# Allegro board H6_PRO_DDR3_V1_1-V163.brd
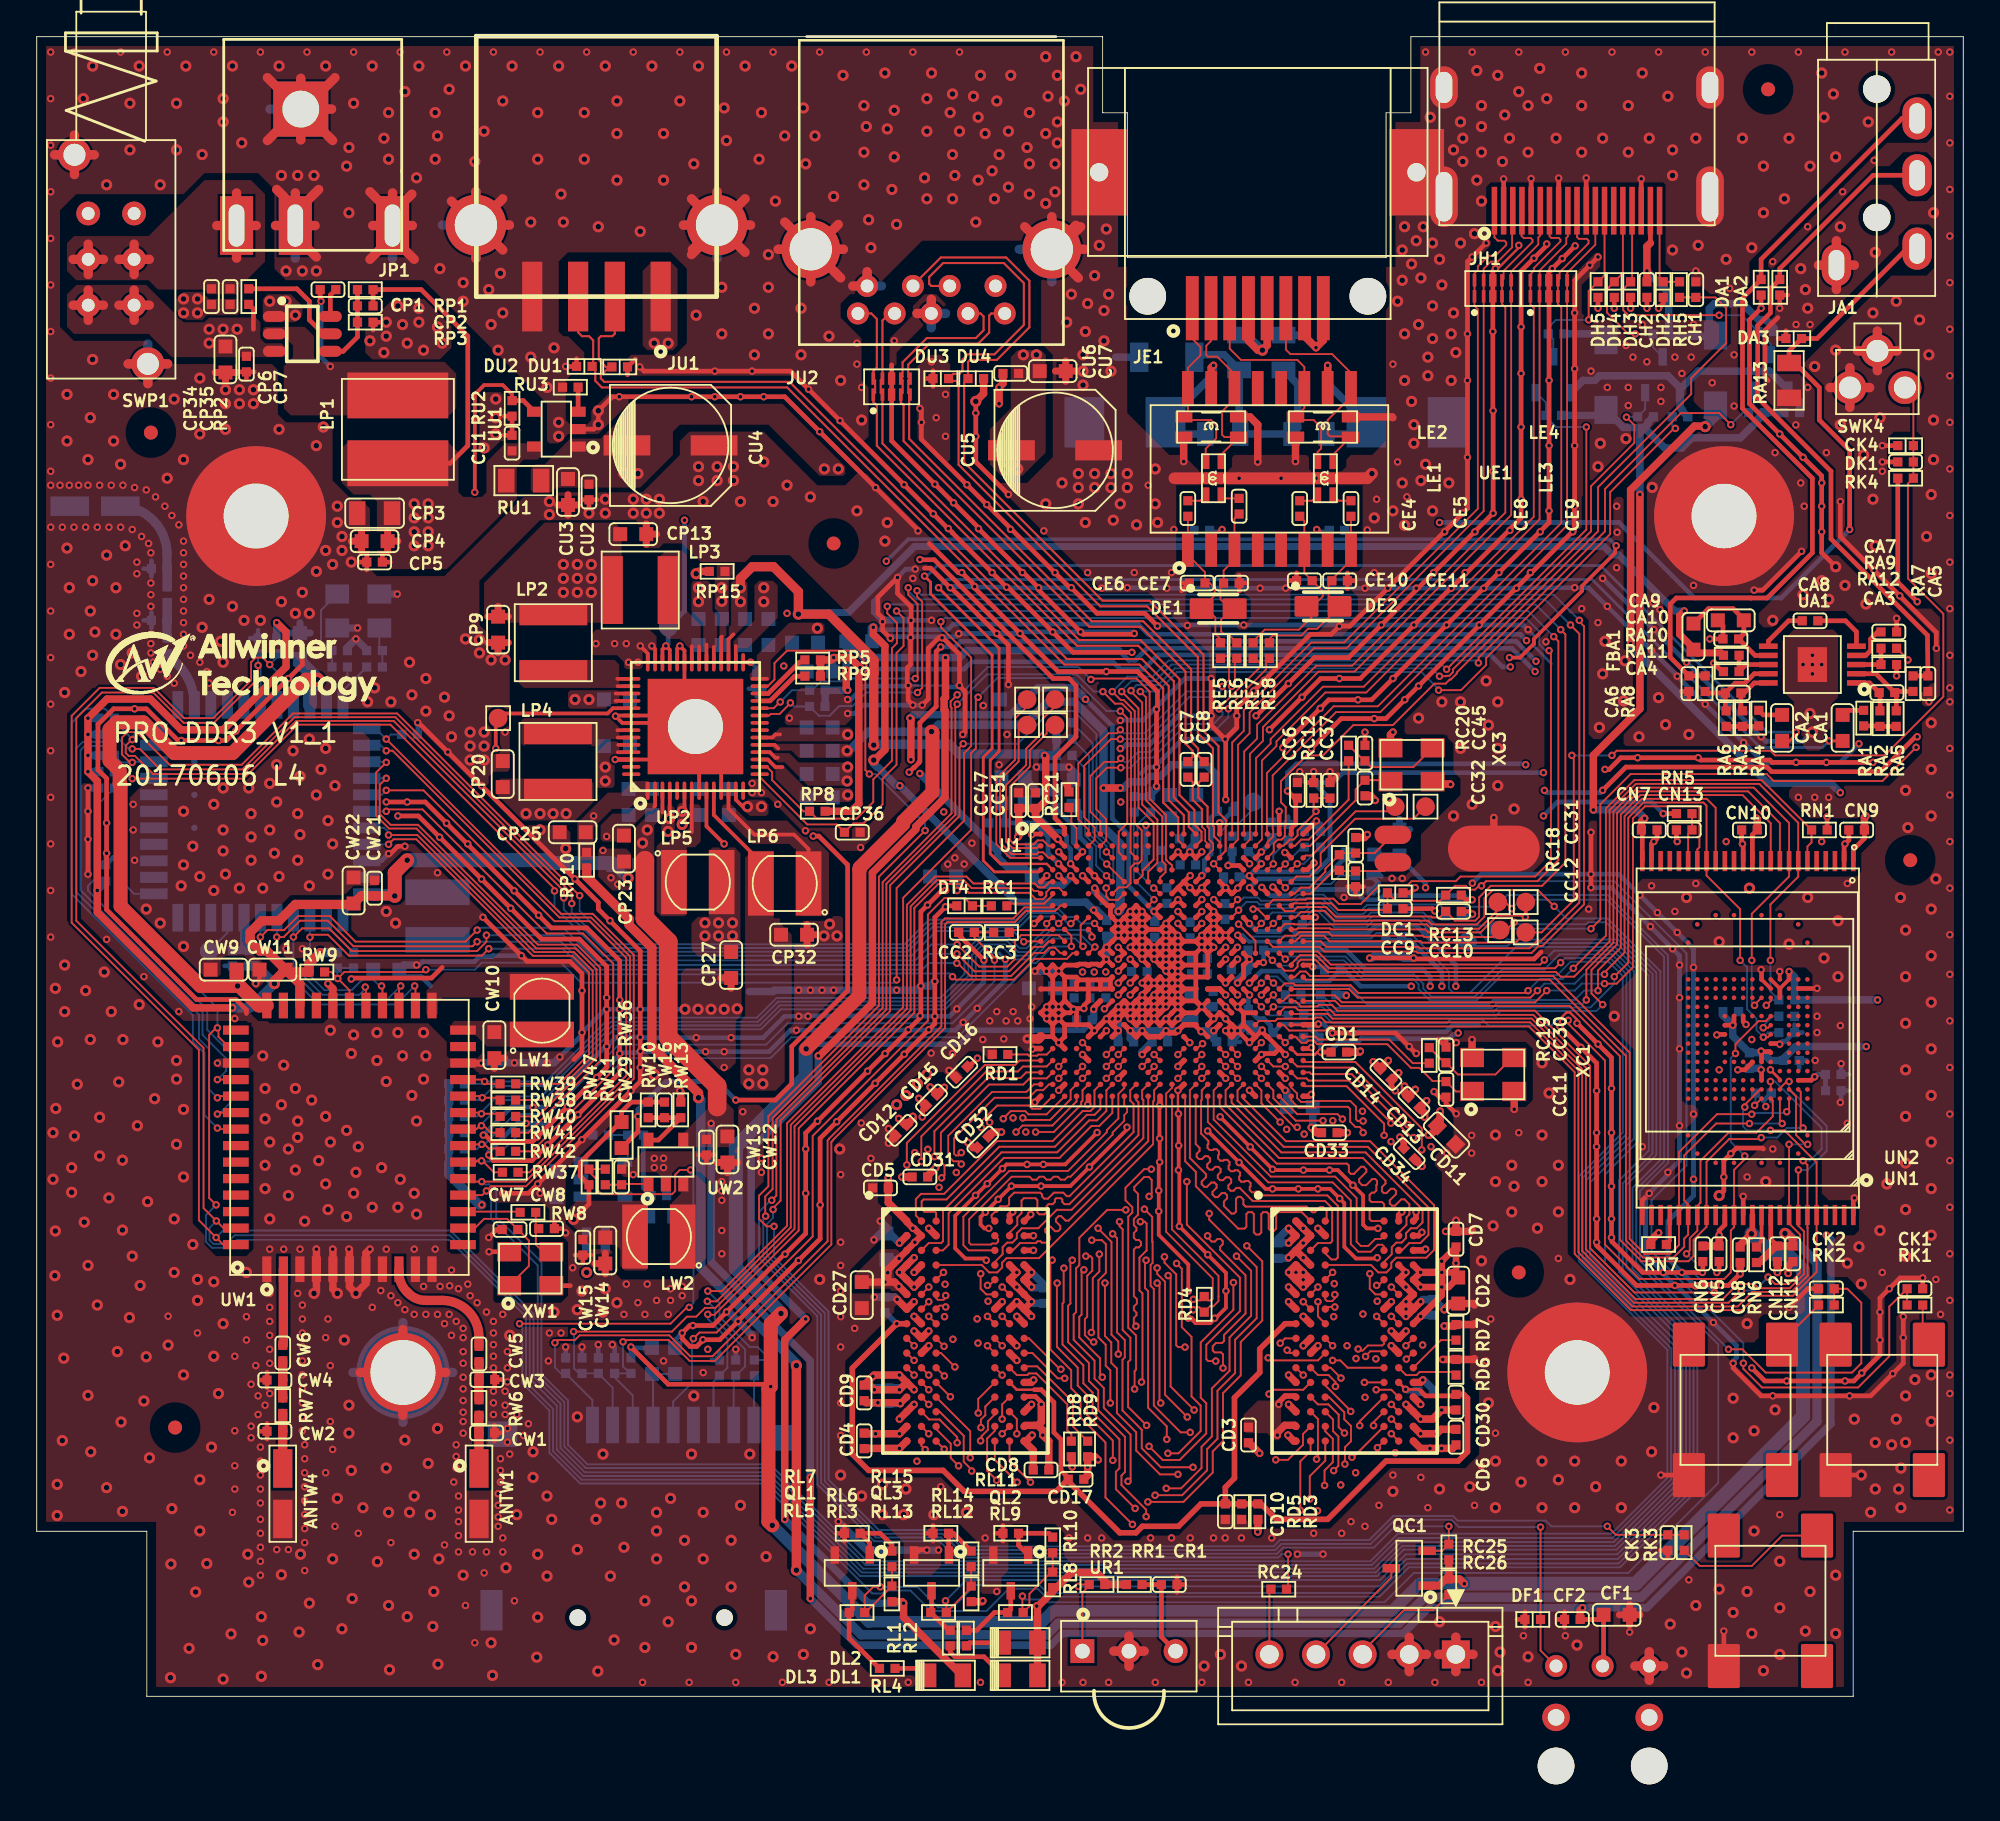
[diagram p0: board, top side]
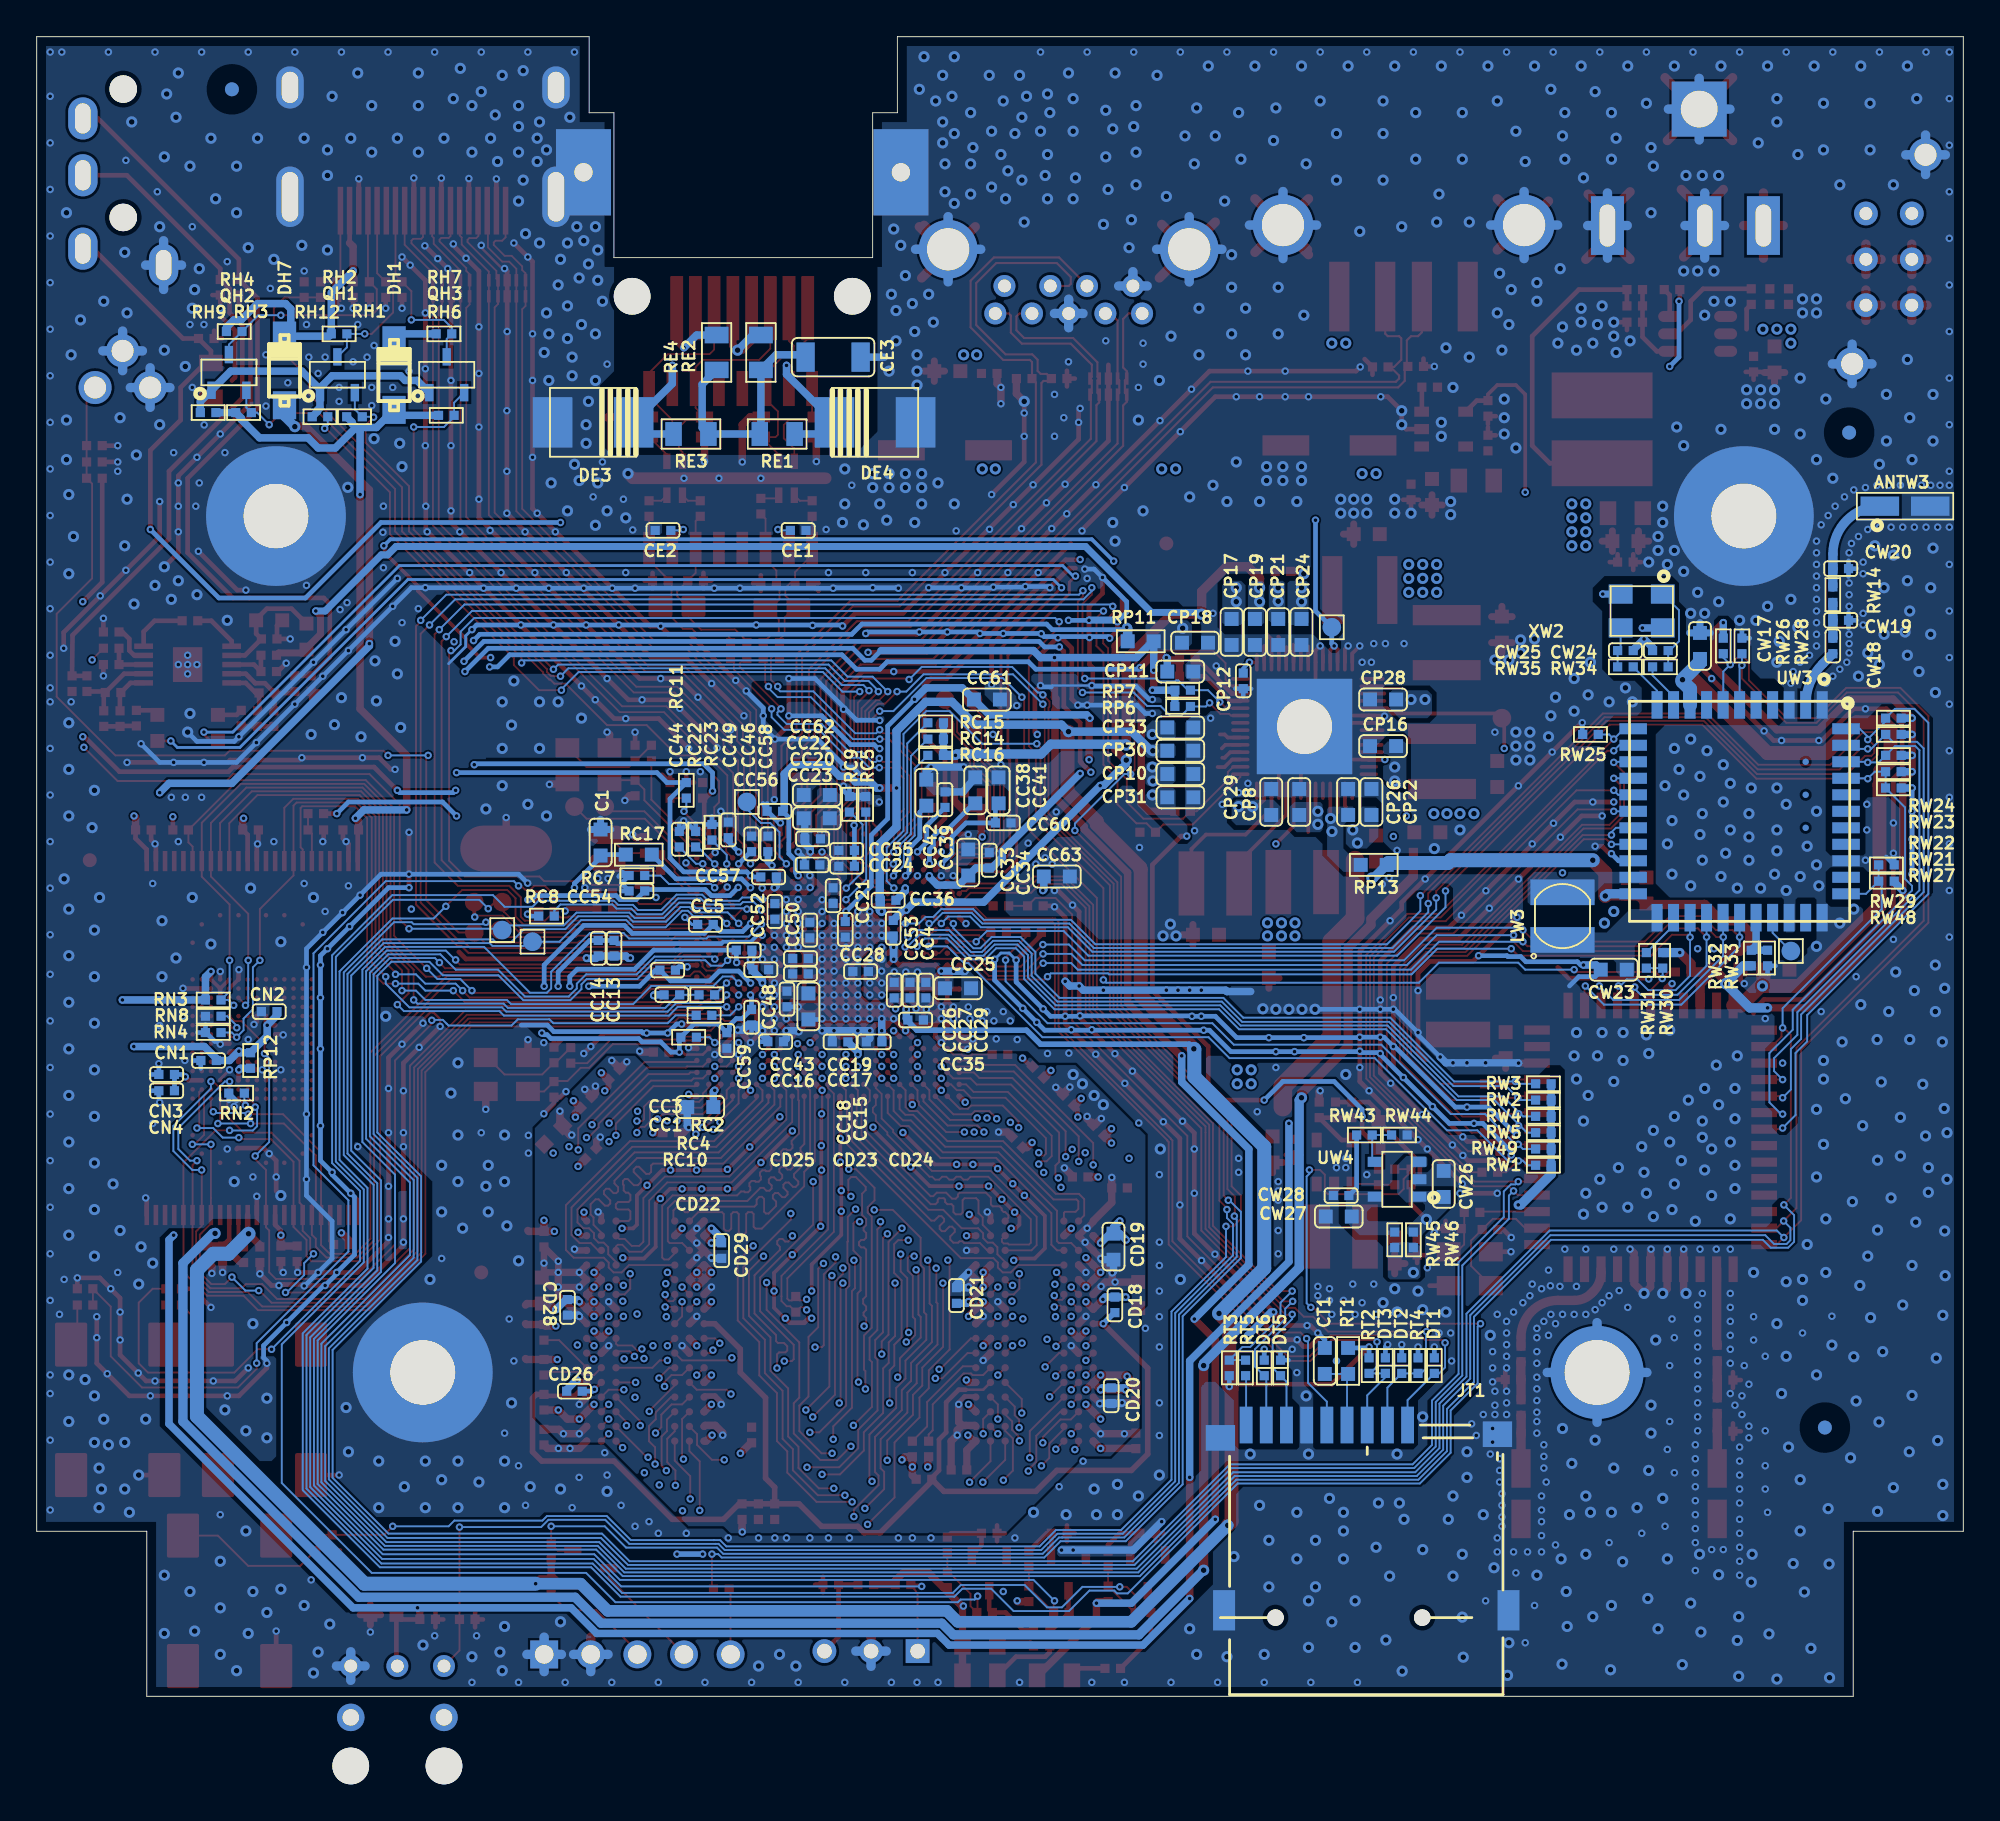
[diagram p1: board, bottom side, seen from below]

Outline 105 x 90.5 mm; copper layers: TOP, L2, L3, BOTTOM. Coordinates in mm from the lower left corner of the outline.
Outline path: 0,90.5 58.09,90.5 58.09,86.35 59.44,86.35 59.44,78.45 73.54,78.45 73.54,86.35 74.89,86.35 74.89,90.5 105,90.5 105,9 99,9 99,0 6,0 6,9 0,9 0,90.5

## Design rules (mm)
net group EPHY-RD: nets EPHY-RDN EPHY-RDP
net group EPHY-RX: nets EPHY-RXN EPHY-RXP
net group EPHY-TD: nets EPHY-TDN EPHY-TDP
net group EPHY-TX: nets EPHY-TXN EPHY-TXP
net group EPY-RX: nets RXN0 RXP0
net group EPY-TX: nets TXN0 TXP0
net group HTX: nets HTXCN HTXCP
net group HTX0: nets HTX0N HTX0P
net group HTX1: nets HTX1N HTX1P
net group HTX2: nets HTX2N HTX2P
net group MIC1: nets MIC1N MIC1P
net group MIC2: nets MIC2N MIC2P
net group SCK: nets SCKN SCKP
net group SDQS0: nets SDQS0N SDQS0P
net group USB1-SSRX: nets USB1-SSRXN USB1-SSRXP
net group USB1-SSTX: nets USB1-SSTXN USB1-SSTXP
net group USB30-1: nets N22859304 N22859306
net group USB-D0: nets USB0-DM USB0-DP
net group USB-D1: nets USB1-DM USB1-DP
net group DQ1: nets SDQ8 SDQ9 SDQ10 SDQ11 SDQ12 SDQ13 SDQ14 SDQ15 SDQM1 SDQS1N SDQS1P
net group DQ2: nets SDQ16 SDQ17 SDQ18 SDQ19 SDQ20 SDQ21 SDQ22 SDQ23 SDQM2 SDQS2N SDQS2P
net group DQ3: nets SDQ24 SDQ25 SDQ26 SDQ27 SDQ28 SDQ29 SDQ30 SDQ31 SDQM3 SDQS3N SDQS3P
nets with their own width: min track width 0.254; nets HDMI-5V

## Placement (name value [footprint] x y rotation side)
ANTW1  NC-ANT  [ANT2B145_525]  24.1 11.05 270 top
ANTW3  NC-ANT  [ANT2B145_525]  3.17 64.9 180 bottom
ANTW4  NC-ANT  [ANT2B145_525]  13.41 11.05 270 top
C1  4.7uF  [C0603]  74.27 46.56 270 bottom
CA1  4.7uF  [C0603]  98.42 52.81 270 top
CA2  4.7uF  [C0603]  95.12 52.81 90 top
CA3  33pF  [C0402]  100.84 54.74 0 top
CA4  33pF  [C0402]  92.46 54.71 180 top
CA5  NC  [C0402]  103.07 55.22 270 top
CA6  NC  [C0402]  90.04 55.22 270 top
CA7  334  [C0402]  100.94 58.04 0 top
CA8  334  [C0402]  96.65 58.65 180 top
CA9  10uF  [C0603]  92.33 58.67 180 top
CA10  104  [C0402]  92.33 57.66 180 top
CC1  NC  [C0402]  70.38 38.25 180 bottom
CC2  5pF  [C0402]  50.67 41.66 0 top
CC3  104  [C0402]  70.61 39.6 0 bottom
CC4  104  [C0402]  58.32 41.88 90 bottom
CC5  104  [C0402]  68.55 42.09 180 bottom
CC6  104  [C0402]  68.71 49.4 270 top
CC7  104  [C0402]  62.74 50.55 90 top
CC8  104  [C0402]  63.63 50.55 90 top
CC9  102  [C0402]  74.04 42.95 180 top
CC10  102  [C0402]  77.22 42.8 180 top
CC11  18pF  [C0402]  76.81 33.1 90 top
CC12  18pF  [C0402]  71.88 44.58 90 top
CC13  1uF  [C0402]  73.53 40.79 90 bottom
CC14  104  [C0402]  74.4 40.79 90 bottom
CC15  10uF  [C0603]  62.94 37.62 90 bottom
CC16  1uF  [C0402]  65.53 39.62 180 bottom
CC17  1uF  [C0402]  63.37 39.4 0 bottom
CC18  104  [C0402]  64.11 38.02 90 bottom
CC19  104  [C0402]  63.37 40.23 0 bottom
CC20  10uF  [C0603]  62.48 47.88 180 bottom
CC21  1uF  [C0402]  61.59 43.66 90 bottom
CC22  1uF  [C0402]  62.74 45.34 180 bottom
CC23  104  [C0402]  62.71 46.76 180 bottom
CC24  104  [C0402]  60.86 45.26 0 bottom
CC25  10uF  [C0603]  54.79 38.61 0 bottom
CC26  1uF  [C0402]  58.27 38.51 90 bottom
CC27  1uF  [C0402]  57.4 38.51 90 bottom
CC28  104  [C0402]  60.1 39.52 180 bottom
CC29  104  [C0402]  56.54 38.51 90 bottom
CC30  18pF  [C0402]  76.81 34.98 270 top
CC31  18pF  [C0402]  71.88 46.41 270 top
CC32  18pF  [C0402]  72.39 49.53 90 top
CC33  10uF  [C0603]  54.23 45.47 270 bottom
CC34  104  [C0402]  53.09 45.59 270 bottom
CC35  1uF  [C0402]  57.1 36.88 0 bottom
CC36  104  [C0402]  58.6 43.41 0 bottom
CC37  102  [C0402]  70.48 49.4 270 top
CC38  4.7uF  [C0603]  53.85 49.4 270 bottom
CC39  1uF  [C0402]  55.5 48.9 270 bottom
CC41  10uF  [C0603]  52.58 49.4 270 bottom
CC42  4.7uF  [C0603]  56.52 49.28 270 bottom
CC43  104  [C0402]  66.45 40.69 0 bottom
CC44  224  [C0402]  69.98 46.74 270 bottom
CC45  18pF  [C0402]  72.39 51.44 270 top
CC46  1uF  [C0402]  66.04 46.48 270 bottom
CC47  104  [C0402]  53.52 48.84 270 top
CC48  104  [C0402]  66.04 37.03 90 bottom
CC49  104  [C0402]  67.31 47.24 270 bottom
CC50  104  [C0402]  62.87 41.78 90 bottom
CC51  104  [C0402]  54.43 48.84 270 top
CC52  1uF  [C0402]  64.77 42.8 90 bottom
CC53  104  [C0402]  60.93 41.82 90 bottom
CC54  104  [C0402]  72.29 43.92 180 bottom
CC55  104  [C0402]  60.86 46.13 0 bottom
CC56  104  [C0402]  64.77 48.26 180 bottom
CC57  104  [C0402]  65.11 44.68 0 bottom
CC58  104  [C0402]  65.15 46.48 270 bottom
CC59  1uF  [C0402]  67.39 35.76 90 bottom
CC60  104  [C0402]  52.32 47.62 0 bottom
CC61  4.7uF  [C0603]  53.21 54.36 0 bottom
CC62  10uF  [C0603]  62.48 49.15 180 bottom
CC63  10uF  [C0603]  49.4 44.7 0 bottom
CD1  104  [C0402]  70.97 35.13 180 top
CD2  10uF  [C0603]  77.47 22.13 90 top
CD3  1uF  [C0402]  66.04 14.25 90 top
CD4  1uF  [C0402]  45.1 13.93 90 top
CD5  1uF  [C0402]  45.98 27.72 0 top
CD6  104  [C0402]  77.35 14.13 90 top
CD7  104  [C0402]  77.35 24.93 270 top
CD8  104  [C0402]  54.74 12.34 0 top
CD9  104  [C0402]  45.1 16.55 270 top
CD10  104  [C0402]  64.78 10.07 90 top
CD11  10uF  [C0603]  76.83 30.61 135 top
CD12  1uF  [C0402]  47.12 30.86 45 top
CD13  1uF  [C0402]  75.06 32.38 135 top
CD14  104  [C0402]  73.53 33.91 135 top
CD15  104  [C0402]  48.77 32.51 45 top
CD16  104  [C0402]  50.42 34.04 45 top
CD17  104  [C0402]  56.64 11.84 180 top
CD18  NC-104  [C0402]  46.24 21.35 270 bottom
CD19  NC-10uF  [C0603]  46.31 24.52 270 bottom
CD20  NC-1uF  [C0402]  46.44 16.39 270 bottom
CD21  NC-104  [C0402]  54.87 21.85 90 bottom
CD22  NC-10uF  [C0603]  68.83 32.13 0 bottom
CD23  NC-1uF  [C0402]  61.21 35.69 0 bottom
CD24  NC-104  [C0402]  59.36 35.69 0 bottom
CD25  NC-104  [C0402]  64.73 35.69 180 bottom
CD26  NC-104  [C0402]  75.69 16.64 180 bottom
CD27  10uF  [C0603]  44.97 21.88 90 top
CD28  NC-1uF  [C0402]  76.07 21.21 270 bottom
CD29  NC-104  [C0402]  67.67 24.31 270 bottom
CD30  104  [C0402]  77.35 16.04 90 top
CD31  104  [C0402]  48.13 28.32 0 top
CD32  104  [C0402]  51.56 30.23 45 top
CD33  104  [C0402]  70.45 30.73 180 top
CD34  104  [C0402]  74.8 29.59 135 top
CE1  104  [C0402]  63.5 63.58 180 bottom
CE2  104  [C0402]  70.87 63.58 0 bottom
CE3  1000pF/2KV  [C1206]  61.59 73.03 180 bottom
CE4  NC-104  [C0402]  62.74 64.77 270 top
CE5  NC-104  [C0402]  65.53 64.9 270 top
CE6  NC-10pF  [C0402]  63.25 60.71 180 top
CE7  NC-10pF  [C0402]  65.11 60.7 0 top
CE8  NC-104  [C0402]  68.83 64.77 270 top
CE9  NC-104  [C0402]  71.63 64.77 270 top
CE10  NC-10pF  [C0402]  69.09 60.83 180 top
CE11  NC-10pF  [C0402]  71.01 60.83 0 top
CF1  4.7uF  [C0603]  86.11 4.45 180 top
CF2  104  [C0402]  83.69 4.19 0 top
CH1  104  [C0402]  90.42 76.71 90 top
CH2  104  [C0402]  87.76 76.71 270 top
CK1  472  [C0402]  102.36 22.23 0 top
CK2  104  [C0402]  97.54 22.23 180 top
CK3  104  [C0402]  88.9 8.38 270 top
CK4  474  [C0402]  101.85 67.31 180 top
CN1  104  [C0402]  95.63 34.67 180 bottom
CN2  104  [C0402]  92.33 37.34 180 bottom
CN3  2.2uF  [C0402]  97.92 33.91 180 bottom
CN4  104  [C0402]  97.92 33.02 180 bottom
CN5  104  [C0402]  91.69 24.13 90 top
CN6  104  [C0402]  90.81 24.13 90 top
CN7  104  [C0402]  87.88 47.24 180 top
CN8  104  [C0402]  92.84 24.08 90 top
CN9  104  [C0402]  99.19 47.24 0 top
CN10  104  [C0402]  93.34 47.24 0 top
CN11  104  [C0402]  95.71 24.13 90 top
CN12  104  [C0402]  94.87 24.13 90 top
CN13  104  [C0402]  89.79 47.24 0 top
CP1  104  [C0402]  15.88 76.71 180 top
CP2  NC-27pF  [C0402]  17.91 75.82 180 top
CP3  22uF  [C0805]  18.41 64.52 180 top
CP4  10uF  [C0603]  18.41 62.99 180 top
CP5  104  [C0402]  18.41 61.85 180 top
CP6  10uF-16V  [C0603]  10.29 72.9 270 top
CP7  104-16V  [C0402]  11.43 72.64 270 top
CP8  10uF  [C0603]  36.2 48.77 90 bottom
CP9  10uF  [C0603]  25.15 58.17 270 top
CP10  10uF  [C0603]  42.67 50.29 180 bottom
CP11  4.7uF  [C0603]  42.67 55.88 0 bottom
CP12  1uF  [C0402]  39.24 55.37 90 bottom
CP13  10uF  [C0603]  32.51 63.37 0 top
CP16  10uF  [C0603]  31.62 51.82 0 bottom
CP17  10uF  [C0603]  39.88 58.04 90 bottom
CP18  10uF  [C0603]  41.87 57.45 0 bottom
CP19  10uF  [C0603]  38.61 58.04 90 bottom
CP20  10uF  [C0603]  25.4 50.29 90 top
CP21  10uF  [C0603]  37.34 58.04 90 bottom
CP22  10uF  [C0603]  32.26 48.77 270 bottom
CP23  4.7uF  [C0603]  32 46.23 90 top
CP24  10uF  [C0603]  36.07 58.04 270 bottom
CP25  4.7uF  [C0603]  29.21 47.12 0 top
CP26  4.7uF  [C0603]  33.53 48.77 270 bottom
CP27  10uF  [C0603]  37.85 39.88 270 top
CP28  10uF  [C0603]  31.62 54.36 180 bottom
CP29  10uF  [C0603]  37.72 48.77 90 bottom
CP30  10uF  [C0603]  42.67 51.56 0 bottom
CP31  10uF  [C0603]  42.67 49.02 0 bottom
CP32  10uF  [C0603]  41.27 41.53 0 top
CP33  10uF  [C0603]  42.67 52.83 0 bottom
CP34  104  [C0402]  9.53 76.33 270 top
CP35  102  [C0402]  10.54 76.33 270 top
CP36  102  [C0402]  44.45 47.12 180 top
CR1  104  [C0402]  61.72 6.1 180 top
CT1  10uF  [C0603]  34.8 18.29 270 bottom
CU1  1uF  [C0402]  25.91 68.34 270 top
CU2  104  [C0402]  30.1 65.67 90 top
CU3  10uF  [C0603]  28.96 65.67 90 top
CU4  220uF  [CA660H770]  34.54 68.21 180 top
CU5  220uF  [CA660H770]  55.5 67.94 180 top
CU6  104  [C0402]  53.09 72.14 0 top
CU7  10uF  [C0603]  55.37 72.26 180 top
CW1  NC  [C0402]  24.52 14.36 0 top
CW2  NC  [C0402]  12.98 14.45 0 top
CW3  NC  [C0402]  24.54 17.27 0 top
CW4  NC  [C0402]  12.98 17.25 0 top
CW5  10pF  [C0402]  24.1 18.67 270 top
CW6  10pF  [C0402]  13.41 18.72 270 top
CW7  18pF  [C0402]  25.8 25.45 0 top
CW8  18pF  [C0402]  27.79 25.5 180 top
CW9  4.7uF  [C0603]  10.19 39.62 0 top
CW10  4.7uF  [C0603]  24.94 35.51 90 top
CW11  4.7uF  [C0603]  12.85 39.62 0 top
CW12  10uF  [C0603]  37.64 29.82 270 top
CW13  104  [C0402]  36.5 29.95 270 top
CW14  10uF  [C0603]  30.99 24.31 270 top
CW15  104  [C0402]  29.77 24.49 270 top
CW16  22pF  [C0402]  34.21 31.98 90 top
CW17  10uF  [C0603]  14.35 57.28 270 bottom
CW18  10pF  [C0402]  7.11 57.28 270 bottom
CW19  NC  [C0402]  6.68 58.67 180 bottom
CW20  NC  [C0402]  6.68 61.49 180 bottom
CW21  4.7uF  [C0402]  18.41 44.07 90 top
CW22  4.7uF  [C0603]  17.27 43.94 90 top
CW23  4.7uF  [C0603]  19.05 39.62 0 bottom
CW24  18pF  [C0402]  16.51 57.02 180 bottom
CW25  18pF  [C0402]  18.41 57.02 0 bottom
CW26  4.7uF  [C0603]  28.32 27.94 90 bottom
CW27  4.7uF  [C0603]  34.04 26.16 0 bottom
CW28  104  [C0402]  33.91 27.3 0 bottom
CW29  104  [C0402]  31.88 28.32 90 top
DA1  NC-ESD5451X  [ESD0402]  93.98 76.83 90 top
DA2  NC-ESD5451X  [ESD0402]  95 76.83 90 top
DA3  ESD5451X  [ESD0402]  95.76 74.04 0 top
DC1  ESD5451X  [ESD0402]  74.04 43.81 0 top
DE1  SPD9103W  [SOD323]  64.39 59.31 0 top
DE2  SPD9103W  [SOD323]  70.1 59.44 0 top
DE3  SPD4200B  [SOD375_470H260]  74.68 69.47 180 bottom
DE4  SPD4200B  [SOD375_470H260]  59.31 69.47 0 bottom
DF1  NC-ESD5451X  [ESD0402]  81.53 4.19 180 top
DH1  BAT54W  [SOD123]  85.72 74.55 270 bottom
DH2  ESD5451X  [ESD0402]  88.65 76.71 270 top
DH3  ESD5451X  [ESD0402]  86.87 76.71 270 top
DH4  ESD5451X  [ESD0402]  85.98 76.71 270 top
DH5  ESD5451X  [ESD0402]  85.09 76.71 270 top
DH7  XBS104S14  [SOD123]  91.69 74.8 270 bottom
DK1  NC-ESD5451X  [ESD0402]  101.85 68.2 180 top
DL1  RED  [LED0805]  53.59 1.14 180 top
DL2  BLUE  [LED0805]  53.59 2.92 180 top
DL3  YELLOW  [LED0805]  49.53 1.14 180 top
DT1  NC-ESD5451X  [ESD0402]  28.83 18.03 90 bottom
DT2  NC-ESD5451X  [ESD0402]  30.61 18.03 90 bottom
DT3  NC-ESD5451X  [ESD0402]  31.5 18.03 90 bottom
DT4  NC-ESD5451X  [ESD0402]  50.57 43.1 180 top
DT5  NC-ESD5451X  [ESD0402]  37.21 17.91 90 bottom
DT6  NC-ESD5451X  [ESD0402]  38.1 17.91 90 bottom
DU1  ESD9B5VL-2/TR  [ESD0402]  31.78 72.49 0 top
DU2  ESD9B5VL-2/TR  [ESD0402]  29.84 72.52 180 top
DU3  ESD9B5VL-2/TR  [ESD0402]  49.28 71.86 180 top
DU4  ESD9B5VL-2/TR  [ESD0402]  51.18 71.86 0 top
FBA1  0R  [L0603]  90.3 57.78 90 top
JA1  PJK-114  [PJ320A]  102.48 86.04 0 top
JC1  CON2  [HDR1_5P250B570_1500H700]  67.18 2.29 0 top
JE1  RJ-45  [RJ8P102B1370_1850H105]  66.55 81.95 90 top
JF1  NC-SIP-7  [OPTICAL_JACK]  82.8 1.65 180 top
JH1  HDMI_19plug type A  [HDMI23P50B1215_1500H838]  83.95 86.3 0 top
JP1  DC-IN-JACK  [DC-1]  19.39 80.2 270 top
JT1  MICROSD/TF_SLOT  [SDC13B1470_1490H170]  32.54 7.44 180 bottom
JU1  USB_A_1  [USB4P200B1310_1420H700]  30.51 76.33 180 top
JU2  USB3.0-AF-SIDE  [USB30AFDIP]  48.76 76.91 180 top
LE1  NC-YCM0805F2SF-801-N  [YPF0805F2SF]  64.14 66.42 90 top
LE2  NC-YLM1206F2SF-101-A  [YLM1206F2SF]  64.01 69.22 0 top
LE3  NC-YCM0805F2SF-801-N  [YPF0805F2SF]  70.23 66.42 90 top
LE4  NC-YLM1206F2SF-101-A  [YLM1206F2SF]  70.1 69.22 0 top
LP1  4.7uH@3A DCR<0.1R  [LP520_580H450]  19.68 69.09 270 top
LP2  1.5uH@3A DCR<0.1R  [LP400_400H120]  28.16 57.45 90 top
LP3  1.5uH@3A DCR<0.1R  [LP400_400H120]  32.89 60.33 180 top
LP4  1.5uH@3A DCR<0.1R  [LP400_400H120]  28.41 50.98 270 top
LP5  1.5uH@2A DCR<0.1R  [LP300_350H210]  36.03 44.4 0 top
LP6  1.5uH@2A DCR<0.1R  [LP300_350H210]  40.77 44.32 180 top
LW1  4.7uH@1A DCR<0.1R  [LP300_350H210]  27.53 37.39 90 top
LW2  4.7uH@1A DCR<0.1R  [LP300_350H210]  33.91 25.07 180 top
LW3  4.7uH@1A DCR<0.1R  [LP300_350H210]  21.84 42.55 90 bottom
NOREF  -  []  0 0 0 top
NOREF#2  -  []  3.68 53.85 0 top
NOREF#3  -  []  0 0 0 top
NOREF#4  -  [unnamed#2]  102.11 45.59 0 top
NOREF#5  -  [unnamed#2]  6.22 68.91 0 top
NOREF#6  -  [unnamed#2]  80.77 23.11 0 top
NOREF#7  -  [unnamed#2]  7.54 14.66 0 top
NOREF#8  -  [unnamed#2]  94.36 87.63 0 top
NOREF#9  -  [unnamed#2]  43.43 62.87 0 top
NOREF#10  -  []  0 0 0 top
NOREF#11  -  [unnamed#2]  94.36 87.63 180 bottom
NOREF#12  -  [unnamed#2]  6.22 68.91 180 bottom
NOREF#13  -  [unnamed#2]  7.54 14.66 180 bottom
QC1  BSN20  [SOT3P95B130_290H103]  74.8 6.99 180 top
QH1  BSN20  [SOT3P95B130_290H103]  88.61 72.06 90 bottom
QH2  BSN20  [SOT3P95B130_290H103]  94.52 72.19 90 bottom
QH3  BSN20  [SOT3P95B130_290H103]  82.65 72.06 90 bottom
QL1  MMBT3904  [SOT3P95B130_290H103]  44.45 6.73 270 top
QL2  MMBT3904  [SOT3P95B130_290H103]  53.09 6.73 270 top
QL3  MMBT3904  [SOT3P95B130_290H103]  48.77 6.73 270 top
RA1  10K  [R0402]  99.57 53.34 90 top
RA2  3K3  [R0402]  100.46 53.31 270 top
RA3  3K3  [R0402]  92.96 53.31 90 top
RA4  10K  [R0402]  93.85 53.34 270 top
RA5  27K  [R0402]  101.35 53.31 90 top
RA6  27K  [R0402]  92.08 53.31 90 top
RA7  0R  [R0402]  102.26 55.22 90 top
RA8  0R  [R0402]  90.93 55.22 270 top
RA9  1K  [R0402]  100.94 57.15 0 top
RA10  4K7  [R0402]  92.35 56.77 0 top
RA11  3K3  [R0402]  92.35 55.88 0 top
RA12  10K  [R0402]  100.94 56.26 0 top
RA13  75R-1%  [R0805]  95.5 71.75 270 top
RC1  33R  [R0402]  52.45 43.1 180 top
RC2  33R  [R0402]  68.48 38.25 180 bottom
RC3  33R  [R0402]  52.58 41.66 180 top
RC4  0R-33R  [R0402]  68.63 37.13 180 bottom
RC5  NC-0R  [R0402]  59.82 48.64 90 bottom
RC7  NC-0R  [R0402]  72.29 44.75 0 bottom
RC8  NC-1K  [R0402]  77.22 42.55 0 bottom
RC9  NC-0R  [R0402]  60.71 48.64 90 bottom
RC10  NC-200R  [R0402]  69.47 35.94 0 bottom
RC11  1K  [R0402]  69.6 49.4 90 bottom
RC12  NC  [R0402]  69.6 49.4 90 top
RC13  10K  [R0402]  77.22 43.69 180 top
RC14  2K  [R0402]  56.01 52.2 180 bottom
RC15  2K  [R0402]  56.01 53.09 180 bottom
RC16  10K  [R0402]  56.01 51.31 180 bottom
RC17  0R  [R0603]  72.19 45.9 180 bottom
RC18  10M-1%  [R0402]  70.99 45.47 270 top
RC19  0R  [R0402]  75.9 34.95 270 top
RC20  0R  [R0402]  71.5 51.44 270 top
RC21  6K04-1%  [R0402]  56.26 48.9 90 top
RC22  150K-1%  [R0402]  69.09 46.74 90 bottom
RC23  10K  [R0402]  68.2 47.12 90 bottom
RC24  0R  [R0402]  67.69 5.84 180 top
RC25  10K  [R0402]  76.96 7.87 90 top
RC26  NC  [R0402]  76.96 5.97 270 top
RD1  240-1%  [R0402]  52.5 35 180 top
RD3  2K-1%  [R0402]  66.56 10.07 270 top
RD4  100R  [R0402]  63.63 21.37 270 top
RD5  2K-1%  [R0402]  65.67 10.07 90 top
RD6  240-1%  [R0402]  77.35 17.94 270 top
RD7  240-1%  [R0402]  77.35 19.85 270 top
RD8  240-1%  [R0402]  56.39 13.49 90 top
RD9  240-1%  [R0402]  57.28 13.49 90 top
RE1  75R-1%  [R0805]  64.64 68.83 0 bottom
RE2  75R-1%  [R0805]  65.53 73.28 270 bottom
RE3  75R-1%  [R0805]  69.34 68.83 180 bottom
RE4  75R-1%  [R0805]  67.94 73.28 270 bottom
RE5  0R  [R0402]  64.52 57.02 90 top
RE6  0R  [R0402]  65.41 57.02 90 top
RE7  0R  [R0402]  66.29 57.02 90 top
RE8  0R  [R0402]  67.18 57.02 90 top
RH1  10K  [R0402]  87.68 69.77 180 bottom
RH2  1K8  [R0402]  88.52 74.3 0 bottom
RH3  10K  [R0402]  93.73 70 180 bottom
RH4  1K8  [R0402]  94.23 74.42 0 bottom
RH5  10K  [R0402]  89.53 76.71 90 top
RH6  56K-1%  [R0402]  82.68 69.85 180 bottom
RH7  56K-1%  [R0402]  82.8 74.3 0 bottom
RH9  NC-0R  [R0402]  95.66 70 0 bottom
RH12  0R  [R0402]  89.56 69.77 0 bottom
RK1  1K  [R0402]  102.36 21.34 180 top
RK2  1K  [R0402]  97.54 21.34 0 top
RK3  1K  [R0402]  89.79 8.38 90 top
RK4  10K  [R0402]  101.85 66.42 180 top
RL1  330R  [R0402]  49.78 3.17 270 top
RL2  330R  [R0402]  50.67 3.17 270 top
RL3  10K  [R0402]  46.61 5.59 90 top
RL4  330R  [R0402]  46.35 1.52 0 top
RL5  NC-0R  [R0402]  44.7 4.57 0 top
RL6  10K  [R0402]  46.61 7.49 270 top
RL7  100K  [R0402]  44.45 8.89 180 top
RL8  NC-10K  [R0402]  55.37 6.35 90 top
RL9  NC-0R  [R0402]  53.34 4.57 0 top
RL10  10K  [R0402]  55.37 8.26 270 top
RL11  100K  [R0402]  53.09 8.89 180 top
RL12  NC-10K  [R0402]  50.93 5.59 90 top
RL13  NC-0R  [R0402]  49.15 4.57 0 top
RL14  10K  [R0402]  50.93 7.49 270 top
RL15  100K  [R0402]  49.28 8.89 180 top
RN1  10K  [R0402]  97.16 47.24 180 top
RN2  0R  [R0402]  94.11 32.89 180 bottom
RN3  10K  [R0402]  95.38 37.97 180 bottom
RN4  10K  [R0402]  95.38 36.2 180 bottom
RN5  10K  [R0402]  89.79 48.13 0 top
RN6  NC-0R  [R0402]  93.73 24.08 90 top
RN7  NC-0R  [R0402]  88.39 24.64 0 top
RN8  0R  [R0402]  95.38 37.08 180 bottom
RP1  16K-1%  [R0402]  17.91 76.71 180 top
RP2  1K  [R0402]  11.56 76.33 270 top
RP3  3K-1%  [R0402]  17.91 74.93 180 top
RP5  0R  [R0402]  42.29 56.52 180 top
RP6  2K  [R0402]  42.55 53.98 0 bottom
RP7  2K  [R0402]  42.55 54.86 0 bottom
RP8  2K  [R0402]  42.55 48.26 180 top
RP9  0R-1%  [R0402]  42.29 55.63 180 top
RP10  0R  [R0402]  29.97 45.59 270 top
RP11  NC-0R  [R0603]  44.83 57.53 180 bottom
RP12  NC-0R  [R0402]  93.34 34.67 270 bottom
RP13  NC-0R  [R0603]  32.13 45.34 0 bottom
RP15  NC-0R  [R0402]  37.08 61.34 0 top
RR1  33R  [R0402]  59.82 6.1 180 top
RR2  10K  [R0402]  57.78 6.1 0 top
RT1  0R  [R0603]  33.53 18.29 270 bottom
RT2  10K  [R0402]  32.38 18.03 270 bottom
RT3  100K  [R0402]  40.01 17.91 90 bottom
RT4  NC-1M  [R0402]  29.72 18.03 270 bottom
RT5  1K  [R0402]  39.12 17.91 270 bottom
RU1  NC-0R  [R0805]  26.54 66.29 0 top
RU2  100K  [R0402]  25.91 70.23 90 top
RU3  4K3-1%  [R0402]  29.08 71.39 0 top
RW1  10K  [R0402]  22.89 28.96 180 bottom
RW2  10K  [R0402]  22.89 32.51 180 bottom
RW3  10K  [R0402]  22.89 33.4 180 bottom
RW4  10K  [R0402]  22.89 31.62 180 bottom
RW5  10K  [R0402]  22.89 30.73 180 bottom
RW6  0R  [R0402]  24.1 15.75 270 top
RW7  0R  [R0402]  13.41 15.85 270 top
RW8  22R  [R0402]  26.77 26.39 180 top
RW9  10K  [R0402]  15.27 39.5 0 top
RW10  10K-1%  [R0402]  33.32 31.98 90 top
RW11  10K  [R0402]  30.99 28.32 270 top
RW13  2K2-1%  [R0402]  35.1 31.98 270 top
RW14  0R  [R0402]  7.11 60.07 270 bottom
RW21  NC-10K  [R0402]  3.81 50.42 0 bottom
RW22  NC-10K  [R0402]  3.81 51.31 0 bottom
RW23  NC-10K  [R0402]  3.81 52.45 0 bottom
RW24  NC-10K  [R0402]  3.81 53.34 0 bottom
RW25  100K  [R0402]  20.32 52.45 180 bottom
RW26  10K  [R0402]  13.08 57.28 90 bottom
RW27  NC-10K  [R0402]  3.81 49.53 0 bottom
RW28  NC-100K  [R0402]  12.06 57.28 270 bottom
RW29  NC-100K  [R0402]  4.19 45.34 0 bottom
RW30  10K  [R0402]  16.38 40.13 90 bottom
RW31  0R  [R0402]  17.27 40.13 270 bottom
RW32  NC-0R  [R0402]  11.56 40.26 270 bottom
RW33  NC-0R  [R0402]  10.67 40.26 270 bottom
RW34  NC-0R  [R0402]  16.51 56.13 0 bottom
RW35  NC-0R  [R0402]  18.41 56.13 180 bottom
RW36  0R  [R0603]  31.88 30.61 90 top
RW37  NC-0R  [R0402]  25.81 28.57 180 top
RW38  NC-0R  [R0402]  25.68 32.51 180 top
RW39  NC-0R  [R0402]  25.68 33.4 180 top
RW40  NC-0R  [R0402]  25.68 31.62 180 top
RW41  NC-0R  [R0402]  25.68 30.73 180 top
RW42  NC-0R  [R0402]  25.68 29.72 180 top
RW43  NC-150K-1%  [R0402]  32.64 30.61 0 bottom
RW44  NC-120K-1%  [R0402]  30.73 30.61 0 bottom
RW45  0R  [R0402]  30.99 24.89 270 bottom
RW46  NC-0R  [R0402]  29.97 24.89 270 bottom
RW47  10K  [R0402]  30.1 28.32 270 top
RW48  10K  [R0402]  4.19 44.45 180 bottom
RW49  10K  [R0402]  22.89 29.84 180 bottom
SWK1  RESET  [SW4_SMD]  100.58 15.62 90 top
SWK2  UBOOT  [SW4_SMD]  92.58 15.62 90 top
SWK3  PWRON  [SW4_SMD]  94.49 5.21 90 top
SWK4  RECOVERY  [TS-026-3]  100.32 73.37 0 top
SWP1  SWITCH  [SW8B700_1300H950]  4.06 78.36 90 top
TP1  TEST  [TP_SMD]  81.15 41.66 0 top
TP2  TEST  [TP_SMD]  77.98 41.15 180 bottom
TP3  TEST  [TP_SMD]  79.76 41.78 0 top
TP4  TEST  [TP_SMD]  81.15 43.31 90 top
TP5  TEST  [TP_SMD]  79.63 41.78 180 bottom
TP6  TEST  [TP_SMD]  79.63 43.31 0 top
TP7  TEST  [TP_SMD]  74.04 48.51 0 top
TP8  TEST  [TP_SMD]  75.69 48.51 0 top
TP9  TEST  [TP_SMD]  66.29 48.77 180 bottom
TP10  I2S1-DIN  [TP_SMD]  9.4 40.64 180 bottom
TP11  HOLD  [MH137CIR300D]  11.96 64.36 0 top
TP12  HOLD  [MH137CIR200D_T]  19.96 17.66 0 top
TP13  HOLD  [MH137CIR300D]  83.96 17.66 0 top
TP14  HOLD  [MH137CIR300D]  91.96 64.36 0 top
TP15  TEST  [TP_SMD]  25.15 53.34 0 top
TP16  TEST  [TP_SMD]  34.42 58.29 180 bottom
TP19  TEST  [TP_SMD]  55.5 54.36 0 top
TP20  TEST  [TP_SMD]  55.5 52.96 0 top
TP21  TEST  [TP_SMD]  53.98 54.36 0 top
TP22  TEST  [TP_SMD]  53.98 52.96 0 top
U1  H6-BGA-1219  [H6]  61.87 39.87 0 top
UA1  SGM8905  [SOP11P50B300_300H110]  96.77 56.26 180 top
UD1  DDR3-FBGA96  [FBGA96C80P9X13]  71.83 19.92 0 top
UD2  DDR3-FBGA96  [FBGA96C80P9X13]  50.62 19.92 0 top
UE1  PM44-11BP  [SOP16P127B673_1270H597]  67.18 66.93 90 top
UH1  AZ1345-04F  [RCLAMP0524P]  78.36 77.22 0 top
UH2  AZ1345-04F  [RCLAMP0524P]  81.41 77.22 0 top
UN1  EMMC_0  [BGA169P50B1200_1600H100_T]  93.25 35.84 180 top
UN2  NC/H27UCG8T2BTRBC  [SOP48P50B1200_1840H120]  93.25 35.9 270 top
UP2  AXP805  [QFN56P40B700_700H75]  35.9 52.88 90 top
UP3  AXP8120  [SOT23-6]  14.48 74.3 270 top
UR1  IR_MODULE  [TO3B575_738H650]  59.53 2.46 0 top
UU1  SY6280  [SOT5P95B160_300H130]  28.32 69.1 180 top
UU2  AZ1345-04F  [RCLAMP0524P]  45.59 71.86 0 top
UW1  AP6356S  [QFN50P90B1300_1500H150]  17.04 30.48 0 top
UW2  SY8088  [SOT5P95B160_300H130]  34.29 29.13 90 top
UW3  NC-AP6255  [QFN44P90B1200_1200H150]  12.19 48.26 270 bottom
UW4  AP2127k-1.8  [SOT5P95B160_300H130]  30.86 28.19 0 bottom
XC1  24M-20pF-10PPM  [X4B250_320H80_SMD]  79.38 33.91 90 top
XC2  32768  [XCOL-SMD]  73.91 46.23 270 top
XC3  24M-20pF-10PPM  [X4B250_320H80_SMD]  74.93 50.8 90 top
XW1  37p4MHz-12pF-10ppm  [X4B250_320H80_SMD]  26.9 23.32 90 top
XW2  NC-26M-20pF-10PPM  [X4B250_320H80_SMD]  17.53 59.18 270 bottom

## Library data of the parts
ANTW1 ANTW3 ANTW4 = ANT_0
C1 CA3-CA10 CC1-CC39 CC41-CC63 CD1 CD18-CD29 CH1 CH2 CN7-CN13 CP8-CP13 CP16-CP33 CP36 CR1 CW1-CW11 CW17-CW25 = CAPACITOR_0
CA1 CA2 CF1 CF2 CT1 CU1-CU7 = CAPACITOR
CD2-CD17 CD30-CD34 = CAPACITOR_0: room: LPDDR3
CE1-CE11 CK1-CK4 = CAP_1
CN1-CN6 = C-C0402: room: EMMC
CP1-CP7 CP34 CP35 CW12-CW16 CW26-CW29 = CAPACITOR_1
DA1-DA3 DC1 DE3 DE4 DF1 DH2-DH5 DK1 DT1-DT6 DU1-DU4 = 1_1.5KE100A
DE1 DE2 = 1_1.5KE100A: Tolerance: RichardLC
DH1 = DIODE_SCHOTTKY_1
DH7 = DIODE_SCHOTTKY_2
DL1-DL3 = LED_0
FBA1 = INDUCTOR_4
JA1 = ST-3507-05G_0
JC1 = CON2_2
JE1 = RJ-45-8-LED_4
JF1 = SIP-7
JH1 = HDMI19_PLUG
JP1 = PHONEJack_DCIN_0
JT1 = SDMMC SLOT_0
JU1 = USB_A_0
JU2 = USB3-MICRO-B_4
LE1 LE3 = YCM0805F2SF-801T01_1
LE2 LE4 = YCM1206F2SF-600T01_0
LP1 LW2 = INDUCTOR_1
LP2-LP6 = INDUCTOR
LW1 LW3 = L-LP2_00X1_60H1_00
QC1 QH1-QH3 = NMOS_0
QL1-QL3 = NPN
RA1-RA12 RC1 RC2 RC4 RC17-RC20 RD1 RD6-RD9 RH5 RH9 RH12 RL1-RL15 RN1 RN5-RN7 RP1-RP3 RP5-RP8 RP10-RP13 RP15 RR1 RR2 RT1-RT5 RU1-RU3 RW10 RW13 RW14 RW21-RW35 RW37-RW44 = R
RA13 = RESISTOR: room: TVLCD
RC3 RC24-RC26 RK1-RK3 RW1-RW9 RW36 RW45 RW46 RW49 = R1_0805: room: DRAM
RC5 RC7-RC16 RC21-RC23 RE1-RE8 RW11 RW47 RW48 = R1_0805
RD3 RD5 = ?_0: room: LPDDR3
RD4 = R: room: LPDDR3
RH1-RH4 RH6 RH7 RP9 = RESISTOR
RK4 = R1 0805
RN2-RN4 RN8 = R-R0402: room: EMMC
SWK1-SWK3 = SW_PUSH
SWK4 = SW_PUSH_0
SWP1 = SWITCH_0
TP1-TP9 TP11-TP16 TP19-TP22 = T_POINT_R
TP10 = TEST POINT SURFACE
U1 = H6-BGA-1219
UA1 = SSM2402/SO_3
UD1 UD2 = DDR3_1: Tolerance: RichardLC
UE1 = J_0
UH1 UH2 UU2 = rRClamp0524P
UN1 = EMMC_0
UN2 = NAND_FLASH_X8
UP2 = AXP806_0
UP3 = AXP8120: Tolerance: RichardLC
UR1 = IR_Module_0
UU1 = RT9266PE_2
UW1 = AP6493_V10_1
UW2 = SY8088
UW3 = AP6493_1
UW4 = uP0107_0
XC1 XC3 XW1 XW2 = CRYSTAL-4_0
XC2 = CRYSTAL_XCOL-3: Tolerance: RichardLC

## Footprints (pads in the part's own frame, mm; a bottom-side part is the same pattern mirrored in y, then rotated)
ANT2B145_525
  rect 2.1x1.05 smd: 1(-1.375,0) 2(1.375,0)
BGA169P50B1200_1600H100_T
  round 0.25 smd: A4(-1.75,6.75) A6(-0.75,6.75) A9(0.75,6.75) A11(1.75,6.75) AA1(-3.25,-3.25) AA2(-2.75,-3.25) AA3(-2.25,-3.25) AA4(-1.75,-3.25) AA5(-1.25,-3.25) AA6(-0.75,-3.25) AA7(-0.25,-3.25) AA8(0.25,-3.25) AA9(0.75,-3.25) AA10(1.25,-3.25) AA11(1.75,-3.25) AA12(2.25,-3.25) AA13(2.75,-3.25) AA14(3.25,-3.25) AE1(-3.25,-5.25) AE14(3.25,-5.25) AG2(-2.75,-6.25) AG13(2.75,-6.25) AH4(-1.75,-6.75) AH6(-0.75,-6.75) AH9(0.75,-6.75) AH11(1.75,-6.75) B2(-2.75,6.25) B13(2.75,6.25) D1(-3.25,5.25) D14(3.25,5.25) H1(-3.25,3.25) H3(-2.25,3.25) H4(-1.75,3.25) H5(-1.25,3.25) H6(-0.75,3.25) H8(0.25,3.25) H9(0.75,3.25) H10(1.25,3.25) H11(1.75,3.25) H12(2.25,3.25) H13(2.75,3.25) H14(3.25,3.25) J1(-3.25,2.75) J2(-2.75,2.75) J3(-2.25,2.75) J4(-1.75,2.75) J5(-1.25,2.75) J6(-0.75,2.75) J7(-0.25,2.75) J8(0.25,2.75) J9(0.75,2.75) J10(1.25,2.75) J11(1.75,2.75) J12(2.25,2.75) J13(2.75,2.75) J14(3.25,2.75) K2(-2.75,2.25) K4(-1.75,2.25) K6(-0.75,2.25) K7(-0.25,2.25) K8(0.25,2.25) K9(0.75,2.25) K10(1.25,2.25) K11(1.75,2.25) K12(2.25,2.25) K13(2.75,2.25) K14(3.25,2.25) L1(-3.25,1.75) L2(-2.75,1.75) L3(-2.25,1.75) L4(-1.75,1.75) L12(2.25,1.75) L13(2.75,1.75) L14(3.25,1.75) M1(-3.25,1.25) M2(-2.75,1.25) M3(-2.25,1.25) M5(-1.25,1.25) M6(-0.75,1.25) M7(-0.25,1.25) M8(0.25,1.25) M9(0.75,1.25) M10(1.25,1.25) M12(2.25,1.25) M13(2.75,1.25) M14(3.25,1.25) N1(-3.25,0.75) N2(-2.75,0.75) N3(-2.25,0.75) N5(-1.25,0.75) N10(1.25,0.75) N12(2.25,0.75) N13(2.75,0.75) N14(3.25,0.75) P1(-3.25,0.25) P2(-2.75,0.25) P3(-2.25,0.25) P5(-1.25,0.25) P10(1.25,0.25) P12(2.25,0.25) P13(2.75,0.25) P14(3.25,0.25) R1(-3.25,-0.25) R2(-2.75,-0.25) R3(-2.25,-0.25) R5(-1.25,-0.25) R10(1.25,-0.25) R12(2.25,-0.25) R13(2.75,-0.25) R14(3.25,-0.25) T1(-3.25,-0.75) T2(-2.75,-0.75) T3(-2.25,-0.75) T5(-1.25,-0.75) T10(1.25,-0.75) T12(2.25,-0.75) T13(2.75,-0.75) T14(3.25,-0.75) U1(-3.25,-1.25) U2(-2.75,-1.25) U3(-2.25,-1.25) U5(-1.25,-1.25) U6(-0.75,-1.25) U7(-0.25,-1.25) U8(0.25,-1.25) U9(0.75,-1.25) U10(1.25,-1.25) U12(2.25,-1.25) U13(2.75,-1.25) U14(3.25,-1.25) V1(-3.25,-1.75) V2(-2.75,-1.75) V3(-2.25,-1.75) V12(2.25,-1.75) V13(2.75,-1.75) V14(3.25,-1.75) W1(-3.25,-2.25) W2(-2.75,-2.25) W3(-2.25,-2.25) W4(-1.75,-2.25) W5(-1.25,-2.25) W6(-0.75,-2.25) W7(-0.25,-2.25) W8(0.25,-2.25) W9(0.75,-2.25) W10(1.25,-2.25) W11(1.75,-2.25) W12(2.25,-2.25) W13(2.75,-2.25) W14(3.25,-2.25) Y2(-2.75,-2.75) Y3(-2.25,-2.75) Y4(-1.75,-2.75) Y5(-1.25,-2.75) Y6(-0.75,-2.75) Y7(-0.25,-2.75) Y8(0.25,-2.75) Y9(0.75,-2.75) Y10(1.25,-2.75) Y11(1.75,-2.75) Y12(2.25,-2.75) Y13(2.75,-2.75) Y14(3.25,-2.75)
C0402
  rect 0.5x0.5 smd: 1(-0.425,0) 2(0.425,0)
C0603
  rect 0.76x0.76 smd: 1(-0.71,0) 2(0.71,0)
C0805
  rect 0.9x1.3 smd: 1(-0.95,0) 2(0.95,0)
C1206
  rect 1x1.6 smd: 1(-1.5,0) 2(1.5,0)
CA660H770
  rect 2.55x1.1 smd: 1(-2.375,0) 2(2.375,0)
DC-1
  rect 3.2x1.8 hole 2.3x0.85: 1(0,0) 2(0,-8.5) 3(0,-5.3)
  rect 3x3 hole 2: 4(-6.35,-5)
ESD0402
  rect 0.5x0.5 smd: 1(-0.425,0) 2(0.425,0)
FBGA96C80P9X13
  round 0.4 smd: A1(-3.2,6) A2(-2.4,6) A3(-1.6,6) A7(1.6,6) A8(2.4,6) A9(3.2,6) B1(-3.2,5.2) B2(-2.4,5.2) B3(-1.6,5.2) B7(1.6,5.2) B8(2.4,5.2) B9(3.2,5.2) C1(-3.2,4.4) C2(-2.4,4.4) C3(-1.6,4.4) C7(1.6,4.4) C8(2.4,4.4) C9(3.2,4.4) D1(-3.2,3.6) D2(-2.4,3.6) D3(-1.6,3.6) D7(1.6,3.6) D8(2.4,3.6) D9(3.2,3.6) E1(-3.2,2.8) E2(-2.4,2.8) E3(-1.6,2.8) E7(1.6,2.8) E8(2.4,2.8) E9(3.2,2.8) F1(-3.2,2) F2(-2.4,2) F3(-1.6,2) F7(1.6,2) F8(2.4,2) F9(3.2,2) G1(-3.2,1.2) G2(-2.4,1.2) G3(-1.6,1.2) G7(1.6,1.2) G8(2.4,1.2) G9(3.2,1.2) H1(-3.2,0.4) H2(-2.4,0.4) H3(-1.6,0.4) H7(1.6,0.4) H8(2.4,0.4) H9(3.2,0.4) J1(-3.2,-0.4) J2(-2.4,-0.4) J3(-1.6,-0.4) J7(1.6,-0.4) J8(2.4,-0.4) J9(3.2,-0.4) K1(-3.2,-1.2) K2(-2.4,-1.2) K3(-1.6,-1.2) K7(1.6,-1.2) K8(2.4,-1.2) K9(3.2,-1.2) L1(-3.2,-2) L2(-2.4,-2) L3(-1.6,-2) L7(1.6,-2) L8(2.4,-2) L9(3.2,-2) M1(-3.2,-2.8) M2(-2.4,-2.8) M3(-1.6,-2.8) M7(1.6,-2.8) M8(2.4,-2.8) M9(3.2,-2.8) N1(-3.2,-3.6) N2(-2.4,-3.6) N3(-1.6,-3.6) N7(1.6,-3.6) N8(2.4,-3.6) N9(3.2,-3.6) P1(-3.2,-4.4) P2(-2.4,-4.4) P3(-1.6,-4.4) P7(1.6,-4.4) P8(2.4,-4.4) P9(3.2,-4.4) R1(-3.2,-5.2) R2(-2.4,-5.2) R3(-1.6,-5.2) R7(1.6,-5.2) R8(2.4,-5.2) R9(3.2,-5.2) T1(-3.2,-6) T2(-2.4,-6) T3(-1.6,-6) T7(1.6,-6) T8(2.4,-6) T9(3.2,-6)
H6
  round 0.3 smd: A1(-7.15,7.15) A3(-5.85,7.15) A5(-4.55,7.15) A6(-3.9,7.15) A8(-2.6,7.15) A9(-1.95,7.15) A10(-1.3,7.15) A12(0,7.15) A13(0.65,7.15) A14(1.3,7.15) A16(2.6,7.15) A17(3.25,7.15) A18(3.9,7.15) A19(4.55,7.15) A20(5.2,7.15) A21(5.85,7.15) A22(6.5,7.15) A23(7.15,7.15) AA1(-7.15,-5.85) AA2(-6.5,-5.85) AA3(-5.85,-5.85) AA4(-5.2,-5.85) AA5(-4.55,-5.85) AA7(-3.25,-5.85) AA8(-2.6,-5.85) AA10(-1.3,-5.85) AA11(-0.65,-5.85) AA13(0.65,-5.85) AA14(1.3,-5.85) AA15(1.95,-5.85) AA16(2.6,-5.85) AA17(3.25,-5.85) AA19(4.55,-5.85) AA20(5.2,-5.85) AA21(5.85,-5.85) AA22(6.5,-5.85) AA23(7.15,-5.85) AB1(-7.15,-6.5) AB2(-6.5,-6.5) AB3(-5.85,-6.5) AB4(-5.2,-6.5) AB5(-4.55,-6.5) AB6(-3.9,-6.5) AB7(-3.25,-6.5) AB8(-2.6,-6.5) AB9(-1.95,-6.5) AB10(-1.3,-6.5) AB11(-0.65,-6.5) AB12(0,-6.5) AB13(0.65,-6.5) AB14(1.3,-6.5) AB15(1.95,-6.5) AB16(2.6,-6.5) AB17(3.25,-6.5) AB18(3.9,-6.5) AB19(4.55,-6.5) AB20(5.2,-6.5) AB21(5.85,-6.5) AB22(6.5,-6.5) AB23(7.15,-6.5) AC1(-7.15,-7.15) AC2(-6.5,-7.15) AC3(-5.85,-7.15) AC4(-5.2,-7.15) AC5(-4.55,-7.15) AC6(-3.9,-7.15) AC7(-3.25,-7.15) AC8(-2.6,-7.15) AC9(-1.95,-7.15) AC10(-1.3,-7.15) AC11(-0.65,-7.15) AC12(0,-7.15) AC13(0.65,-7.15) AC14(1.3,-7.15) AC15(1.95,-7.15) AC16(2.6,-7.15) AC17(3.25,-7.15) AC18(3.9,-7.15) AC19(4.55,-7.15) AC20(5.2,-7.15) AC21(5.85,-7.15) AC22(6.5,-7.15) AC23(7.15,-7.15) B1(-7.15,6.5) B2(-6.5,6.5) B3(-5.85,6.5) B4(-5.2,6.5) B5(-4.55,6.5) B6(-3.9,6.5) B7(-3.25,6.5) B8(-2.6,6.5) B9(-1.95,6.5) B10(-1.3,6.5) B12(0,6.5) B13(0.65,6.5) B14(1.3,6.5) B15(1.95,6.5) B16(2.6,6.5) B17(3.25,6.5) B18(3.9,6.5) B19(4.55,6.5) B20(5.2,6.5) B21(5.85,6.5) B22(6.5,6.5) B23(7.15,6.5) C1(-7.15,5.85) C2(-6.5,5.85) C3(-5.85,5.85) C4(-5.2,5.85) C5(-4.55,5.85) C7(-3.25,5.85) C8(-2.6,5.85) C9(-1.95,5.85) C12(0,5.85) C13(0.65,5.85) C14(1.3,5.85) C15(1.95,5.85) C16(2.6,5.85) C18(3.9,5.85) C19(4.55,5.85) C20(5.2,5.85) C22(6.5,5.85) C23(7.15,5.85) D1(-7.15,5.2) D2(-6.5,5.2) D3(-5.85,5.2) D4(-5.2,5.2) D5(-4.55,5.2) D9(-1.95,5.2) D11(-0.65,5.2) D12(0,5.2) D15(1.95,5.2) D16(2.6,5.2) D18(3.9,5.2) D19(4.55,5.2) D20(5.2,5.2) D21(5.85,5.2) D22(6.5,5.2) D23(7.15,5.2) E1(-7.15,4.55) E2(-6.5,4.55) E3(-5.85,4.55) E4(-5.2,4.55) E5(-4.55,4.55) E6(-3.9,4.55) E7(-3.25,4.55) E8(-2.6,4.55) E9(-1.95,4.55) E10(-1.3,4.55) E11(-0.65,4.55) E12(0,4.55) E13(0.65,4.55) E14(1.3,4.55) E15(1.95,4.55) E16(2.6,4.55) E17(3.25,4.55) E18(3.9,4.55) E19(4.55,4.55) E21(5.85,4.55) E22(6.5,4.55) F1(-7.15,3.9) F2(-6.5,3.9) F3(-5.85,3.9) F5(-4.55,3.9) F7(-3.25,3.9) F8(-2.6,3.9) F9(-1.95,3.9) F11(-0.65,3.9) F12(0,3.9) F13(0.65,3.9) F14(1.3,3.9) F15(1.95,3.9) F16(2.6,3.9) F17(3.25,3.9) F19(4.55,3.9) F20(5.2,3.9) F21(5.85,3.9) F22(6.5,3.9) F23(7.15,3.9) G2(-6.5,3.25) G3(-5.85,3.25) G7(-3.25,3.25) G8(-2.6,3.25) G9(-1.95,3.25) G10(-1.3,3.25) G11(-0.65,3.25) G12(0,3.25) G13(0.65,3.25) G14(1.3,3.25) G15(1.95,3.25) G16(2.6,3.25) G17(3.25,3.25) G20(5.2,3.25) G21(5.85,3.25) G22(6.5,3.25) H1(-7.15,2.6) H2(-6.5,2.6) H3(-5.85,2.6) H4(-5.2,2.6) H5(-4.55,2.6) H6(-3.9,2.6) H7(-3.25,2.6) H8(-2.6,2.6) H9(-1.95,2.6) H10(-1.3,2.6) H11(-0.65,2.6) H12(0,2.6) H13(0.65,2.6) H14(1.3,2.6) H15(1.95,2.6) H16(2.6,2.6) H17(3.25,2.6) H18(3.9,2.6) H19(4.55,2.6) H20(5.2,2.6) H21(5.85,2.6) H22(6.5,2.6) H23(7.15,2.6) J2(-6.5,1.95) J3(-5.85,1.95) J5(-4.55,1.95) J6(-3.9,1.95) J7(-3.25,1.95) J8(-2.6,1.95) J9(-1.95,1.95) J10(-1.3,1.95) J11(-0.65,1.95) J12(0,1.95) J13(0.65,1.95) J14(1.3,1.95) J15(1.95,1.95) J16(2.6,1.95) J17(3.25,1.95) J19(4.55,1.95) J20(5.2,1.95) J21(5.85,1.95) J22(6.5,1.95) K1(-7.15,1.3) K2(-6.5,1.3) K3(-5.85,1.3) K7(-3.25,1.3) K8(-2.6,1.3) K9(-1.95,1.3) K10(-1.3,1.3) K11(-0.65,1.3) K12(0,1.3) K13(0.65,1.3) K14(1.3,1.3) K15(1.95,1.3) K16(2.6,1.3) K17(3.25,1.3) K18(3.9,1.3) K20(5.2,1.3) K21(5.85,1.3) K22(6.5,1.3) K23(7.15,1.3) L2(-6.5,0.65) L3(-5.85,0.65) L4(-5.2,0.65) L5(-4.55,0.65) L6(-3.9,0.65) L7(-3.25,0.65) L8(-2.6,0.65) L9(-1.95,0.65) L10(-1.3,0.65) L11(-0.65,0.65) L12(0,0.65) L13(0.65,0.65) L14(1.3,0.65) L15(1.95,0.65) L16(2.6,0.65) L17(3.25,0.65) L18(3.9,0.65) L19(4.55,0.65) L20(5.2,0.65) L21(5.85,0.65) L22(6.5,0.65) M1(-7.15,0) M2(-6.5,0) M3(-5.85,0) M4(-5.2,0) M5(-4.55,0) M6(-3.9,0) M7(-3.25,0) M8(-2.6,0) M9(-1.95,0) M10(-1.3,0) M11(-0.65,0) M12(0,0) M13(0.65,0) M14(1.3,0) M15(1.95,0) M16(2.6,0) M17(3.25,0) M18(3.9,0) M19(4.55,0) M21(5.85,0) M22(6.5,0) M23(7.15,0) N2(-6.5,-0.65) N3(-5.85,-0.65) N7(-3.25,-0.65) N8(-2.6,-0.65) N9(-1.95,-0.65) N10(-1.3,-0.65) N11(-0.65,-0.65) N12(0,-0.65) N13(0.65,-0.65) N14(1.3,-0.65) N15(1.95,-0.65) N16(2.6,-0.65) N17(3.25,-0.65) N18(3.9,-0.65) N19(4.55,-0.65) N20(5.2,-0.65) N22(6.5,-0.65) N23(7.15,-0.65) P1(-7.15,-1.3) P2(-6.5,-1.3) P3(-5.85,-1.3) P4(-5.2,-1.3) P5(-4.55,-1.3) P6(-3.9,-1.3) P7(-3.25,-1.3) P8(-2.6,-1.3) P9(-1.95,-1.3) P10(-1.3,-1.3) P11(-0.65,-1.3) P12(0,-1.3) P13(0.65,-1.3) P14(1.3,-1.3) P15(1.95,-1.3) P16(2.6,-1.3) P17(3.25,-1.3) P18(3.9,-1.3) P19(4.55,-1.3) P20(5.2,-1.3) P21(5.85,-1.3) P22(6.5,-1.3) R2(-6.5,-1.95) R3(-5.85,-1.95) R5(-4.55,-1.95) R6(-3.9,-1.95) R7(-3.25,-1.95) R8(-2.6,-1.95) R9(-1.95,-1.95) R10(-1.3,-1.95) R11(-0.65,-1.95) R12(0,-1.95) R13(0.65,-1.95) R14(1.3,-1.95) R15(1.95,-1.95) R16(2.6,-1.95) R17(3.25,-1.95) R18(3.9,-1.95) R19(4.55,-1.95) R20(5.2,-1.95) R21(5.85,-1.95) R22(6.5,-1.95) R23(7.15,-1.95) T1(-7.15,-2.6) T2(-6.5,-2.6) T3(-5.85,-2.6) T7(-3.25,-2.6) T8(-2.6,-2.6) T9(-1.95,-2.6) T10(-1.3,-2.6) T11(-0.65,-2.6) T12(0,-2.6) T13(0.65,-2.6) T14(1.3,-2.6) T15(1.95,-2.6) T16(2.6,-2.6) T17(3.25,-2.6) T18(3.9,-2.6) T19(4.55,-2.6) T20(5.2,-2.6) T21(5.85,-2.6) T22(6.5,-2.6) U2(-6.5,-3.25) U3(-5.85,-3.25) U4(-5.2,-3.25) U5(-4.55,-3.25) U6(-3.9,-3.25) U7(-3.25,-3.25) U8(-2.6,-3.25) U9(-1.95,-3.25) U10(-1.3,-3.25) U11(-0.65,-3.25) U12(0,-3.25) U13(0.65,-3.25) U14(1.3,-3.25) U15(1.95,-3.25) U16(2.6,-3.25) U17(3.25,-3.25) U18(3.9,-3.25) U19(4.55,-3.25) U21(5.85,-3.25) U22(6.5,-3.25) U23(7.15,-3.25) V1(-7.15,-3.9) V2(-6.5,-3.9) V3(-5.85,-3.9) V5(-4.55,-3.9) V6(-3.9,-3.9) V7(-3.25,-3.9) V9(-1.95,-3.9) V10(-1.3,-3.9) V11(-0.65,-3.9) V13(0.65,-3.9) V15(1.95,-3.9) V17(3.25,-3.9) V19(4.55,-3.9) V20(5.2,-3.9) V21(5.85,-3.9) V22(6.5,-3.9) V23(7.15,-3.9) W1(-7.15,-4.55) W2(-6.5,-4.55) W3(-5.85,-4.55) W4(-5.2,-4.55) W5(-4.55,-4.55) W7(-3.25,-4.55) W8(-2.6,-4.55) W10(-1.3,-4.55) W11(-0.65,-4.55) W13(0.65,-4.55) W14(1.3,-4.55) W16(2.6,-4.55) W17(3.25,-4.55) W19(4.55,-4.55) W21(5.85,-4.55) W22(6.5,-4.55) W23(7.15,-4.55) Y1(-7.15,-5.2) Y2(-6.5,-5.2) Y3(-5.85,-5.2) Y5(-4.55,-5.2) Y7(-3.25,-5.2) Y8(-2.6,-5.2) Y10(-1.3,-5.2) Y11(-0.65,-5.2) Y13(0.65,-5.2) Y14(1.3,-5.2) Y16(2.6,-5.2) Y17(3.25,-5.2) Y19(4.55,-5.2) Y20(5.2,-5.2) Y21(5.85,-5.2) Y22(6.5,-5.2) Y23(7.15,-5.2)
HDMI23P50B1215_1500H838
  rect 0.3x2.6 smd: 1(-4.5,-5.285) 2(-4,-5.285) 3(-3.5,-5.285) 4(-3,-5.285) 5(-2.5,-5.285) 6(-2,-5.285) 7(-1.5,-5.285) 8(-1,-5.285) 9(-0.5,-5.285) 10(0,-5.285) 11(0.5,-5.285) 12(1,-5.285) 13(1.5,-5.285) 14(2,-5.285) 15(2.5,-5.285) 16(3,-5.285) 17(3.5,-5.285) 18(4,-5.285) 19(4.5,-5.285)
  oval 1.5x3.3 hole 0.9x2.7: 20(7.25,-4.525) 21(-7.25,-4.525)
  oval 1.5x2.3 hole 0.9x1.7: 22(7.25,1.435) 23(-7.25,1.435)
HDR1_5P250B570_1500H700
  rect 1.524x1.524 hole 1.016: 1(10.16,0)
  round 1.524 hole 1.016: 2(7.62,0) 3(5.08,0) 4(2.54,0) 5(0,0)
L0603
  rect 0.76x0.76 smd: 1(-0.71,0) 2(0.71,0)
LED0805
  rect 0.9x1.3 smd: 1(-0.95,0) 2(0.95,0)
LP300_350H210
  rect 1.4x3.5 smd: 1(-1.3,0) 2(1.3,0)
LP400_400H120
  rect 1.1x3.7 smd: 1(-1.5,0) 2(1.5,0)
LP520_580H450
  rect 2.5x5.5 smd: 1(-1.85,0) 2(1.85,0)
MH137CIR200D_T
  round 4.318 hole 3.48: 1(0,0)
MH137CIR300D
  round 7.62 hole 3.48: 1(0,0)
OPTICAL_JACK
  round 2 hole 2 unplated: (-5.08,5.45) (0,5.45)
  round 1.2 hole 0.7: 1(0,0) 2(-2.54,0) 3(-5.08,0)
  round 1.5 hole 0.9: 4(0,2.8) 5(-5.08,2.8)
PJ320A
  round 1.5 hole 1.5 unplated: (-2.2,1.6) (-2.2,-5.4)
  oval 1.6x2.3 hole 0.85x1.65: 1(0,0) 2(0,-3.1) 3(0,-7.1) 4(-4.4,-8)
QFN44P90B1200_1200H150
  rect 1.5x0.6 smd: 1(-5.8,4.5) 2(-5.8,3.6) 3(-5.8,2.7) 4(-5.8,1.8) 5(-5.8,0.9) 6(-5.8,0) 7(-5.8,-0.9) 8(-5.8,-1.8) 9(-5.8,-2.7) 10(-5.8,-3.6) 11(-5.8,-4.5) 23(5.8,-4.5) 24(5.8,-3.6) 25(5.8,-2.7) 26(5.8,-1.8) 27(5.8,-0.9) 28(5.8,0) 29(5.8,0.9) 30(5.8,1.8) 31(5.8,2.7) 32(5.8,3.6) 33(5.8,4.5)
  rect 0.6x1.5 smd: 12(-4.5,-5.8) 13(-3.6,-5.8) 14(-2.7,-5.8) 15(-1.8,-5.8) 16(-0.9,-5.8) 17(0,-5.8) 18(0.9,-5.8) 19(1.8,-5.8) 20(2.7,-5.8) 21(3.6,-5.8) 22(4.5,-5.8) 34(4.5,5.8) 35(3.6,5.8) 36(2.7,5.8) 37(1.8,5.8) 38(0.9,5.8) 39(0,5.8) 40(-0.9,5.8) 41(-1.8,5.8) 42(-2.7,5.8) 43(-3.6,5.8) 44(-4.5,5.8)
  round 0.35 smd: 45(-2.7,3.6) 46(-0.9,3.6) 47(0.9,3.6)
QFN50P90B1300_1500H150
  rect 0.5x1.4 smd: 1(-4.5,-7.19) 2(-3.6,-7.19) 3(-2.7,-7.19) 4(-1.8,-7.19) 5(-0.9,-7.19) 6(0,-7.19) 7(0.9,-7.19) 8(1.8,-7.19) 9(2.7,-7.19) 10(3.6,-7.19) 11(4.5,-7.19) 26(4.5,7.19) 27(3.6,7.19) 28(2.7,7.19) 29(1.8,7.19) 30(0.9,7.19) 31(0,7.19) 32(-0.9,7.19) 33(-1.8,7.19) 34(-2.7,7.19) 35(-3.6,7.19) 36(-4.5,7.19)
  rect 1.4x0.5 smd: 12(6.19,-5.85) 13(6.19,-4.95) 14(6.19,-4.05) 15(6.19,-3.15) 16(6.19,-2.25) 17(6.19,-1.35) 18(6.19,-0.45) 19(6.19,0.45) 20(6.19,1.35) 21(6.19,2.25) 22(6.19,3.15) 23(6.19,4.05) 24(6.19,4.95) 25(6.19,5.85) 37(-6.19,5.85) 38(-6.19,4.95) 39(-6.19,4.05) 40(-6.19,3.15) 41(-6.19,2.25) 42(-6.19,1.35) 43(-6.19,0.45) 44(-6.19,-0.45) 45(-6.19,-1.35) 46(-6.19,-2.25) 47(-6.19,-3.15) 48(-6.19,-4.05) 49(-6.19,-4.95) 50(-6.19,-5.85)
QFN56P40B700_700H75
  oval 1x0.2 smd: 1(-3.5,2.6) 2(-3.5,2.2) 3(-3.5,1.8) 4(-3.5,1.4) 5(-3.5,1) 6(-3.5,0.6) 7(-3.5,0.2) 8(-3.5,-0.2) 9(-3.5,-0.6) 10(-3.5,-1) 11(-3.5,-1.4) 12(-3.5,-1.8) 13(-3.5,-2.2) 14(-3.5,-2.6) 29(3.5,-2.6) 30(3.5,-2.2) 31(3.5,-1.8) 32(3.5,-1.4) 33(3.5,-1) 34(3.5,-0.6) 35(3.5,-0.2) 36(3.5,0.2) 37(3.5,0.6) 38(3.5,1) 39(3.5,1.4) 40(3.5,1.8) 41(3.5,2.2) 42(3.5,2.6)
  oval 0.2x1 smd: 15(-2.6,-3.5) 16(-2.2,-3.5) 17(-1.8,-3.5) 18(-1.4,-3.5) 19(-1,-3.5) 20(-0.6,-3.5) 21(-0.2,-3.5) 22(0.2,-3.5) 23(0.6,-3.5) 24(1,-3.5) 25(1.4,-3.5) 26(1.8,-3.5) 27(2.2,-3.5) 28(2.6,-3.5) 43(2.6,3.5) 44(2.2,3.5) 45(1.8,3.5) 46(1.4,3.5) 47(1,3.5) 48(0.6,3.5) 49(0.2,3.5) 50(-0.2,3.5) 51(-0.6,3.5) 52(-1,3.5) 53(-1.4,3.5) 54(-1.8,3.5) 55(-2.2,3.5) 56(-2.6,3.5)
  rect 5.2x5.2 hole 3: 57(0,0)
R0402
  rect 0.5x0.5 smd: 1(-0.425,0) 2(0.425,0)
R0603
  rect 0.76x0.76 smd: 1(-0.71,0) 2(0.71,0)
R0805
  rect 0.9x1.3 smd: 1(-0.95,0) 2(0.95,0)
RCLAMP0524P
  rect 0.2x0.675 smd: 1(0,-0.875) 2(0.5,-0.875) 4(1.5,-0.875) 5(2,-0.875) 6(2,0) 7(1.5,0) 9(0.5,0) 10(0,0)
  rect 0.4x0.67 smd: 3(1,-0.875) 8(1,0)
RJ8P102B1370_1850H105
  round 2 hole 2 unplated: (-5.606,6) (-5.606,-6)
  rect 3.5x0.7 smd: 1(-6.256,3.57) 2(-6.256,2.55) 3(-6.256,1.53) 4(-6.256,0.51) 5(-6.256,-0.51) 6(-6.256,-1.53) 7(-6.256,-2.55) 8(-6.256,-3.57)
  rect 4.7x3 hole 1: 9(1.156,-8.65) 10(1.156,8.65)
SDC13B1470_1490H170
  round 0.9 hole 0.9 unplated: (-4.95,-3.15) (3.05,-3.15)
  rect 0.7x2 smd: 1(2.25,7.35) 2(1.15,7.35) 3(0.05,7.35) 4(-1.05,7.35) 5(-2.15,7.35) 6(-3.25,7.35) 7(-4.35,7.35) 8(-5.45,7.35) 9(-6.55,7.35)
  rect 1.6x1.4 smd: 10(-7.95,6.65) 12(7.15,6.85)
  rect 1.2x2.2 smd: 11(-7.75,-2.75) 13(7.75,-2.75)
SOD123
  rect 1.524x1.27 smd: A(4.4,0.2) C(0.6,0.2)
SOD323
  custom 1.3x1.126 smd: 1(0.9,0) 2(-0.9,0)
SOD375_470H260
  rect 2.16x2.75 smd: 1(-2.21,0) 2(2.21,0)
SOP11P50B300_300H110
  rect 1.02x0.3 smd: 1(-2.4,1) 2(-2.4,0.5) 3(-2.4,0) 4(-2.4,-0.5) 5(-2.4,-1) 6(2.4,-1) 7(2.4,-0.5) 8(2.4,0) 9(2.4,0.5) 10(2.4,1)
  rect 1.6x1.9 smd: 11(0,0)
SOP16P127B673_1270H597
  rect 1.91x0.64 smd: 1(-4.385,4.445) 2(-4.385,3.175) 3(-4.385,1.905) 4(-4.385,0.635) 5(-4.385,-0.635) 6(-4.385,-1.905) 7(-4.385,-3.175) 8(-4.385,-4.445) 9(4.385,-4.445) 10(4.385,-3.175) 11(4.385,-1.905) 12(4.385,-0.635) 13(4.385,0.635) 14(4.385,1.905) 15(4.385,3.175) 16(4.385,4.445)
SOP48P50B1200_1840H120
  rect 1.1x0.25 smd: 1(-9.65,5.75) 2(-9.65,5.25) 3(-9.65,4.75) 4(-9.65,4.25) 5(-9.65,3.75) 6(-9.65,3.25) 7(-9.65,2.75) 8(-9.65,2.25) 9(-9.65,1.75) 10(-9.65,1.25) 11(-9.65,0.75) 12(-9.65,0.25) 13(-9.65,-0.25) 14(-9.65,-0.75) 15(-9.65,-1.25) 16(-9.65,-1.75) 17(-9.65,-2.25) 18(-9.65,-2.75) 19(-9.65,-3.25) 20(-9.65,-3.75) 21(-9.65,-4.25) 22(-9.65,-4.75) 23(-9.65,-5.25) 24(-9.65,-5.75) 25(9.65,-5.75) 26(9.65,-5.25) 27(9.65,-4.75) 28(9.65,-4.25) 29(9.65,-3.75) 30(9.65,-3.25) 31(9.65,-2.75) 32(9.65,-2.25) 33(9.65,-1.75) 34(9.65,-1.25) 35(9.65,-0.75) 36(9.65,-0.25) 37(9.65,0.25) 38(9.65,0.75) 39(9.65,1.25) 40(9.65,1.75) 41(9.65,2.25) 42(9.65,2.75) 43(9.65,3.25) 44(9.65,3.75) 45(9.65,4.25) 46(9.65,4.75) 47(9.65,5.25) 48(9.65,5.75)
SOT3P95B130_290H103
  rect 0.95x0.46 smd: 1(-0.975,0.95) 2(-0.975,-0.95) 3(0.975,0)
SOT5P95B160_300H130
  rect 0.8x0.55 smd: 1(-1.2,0.95) 2(-1.2,0) 3(-1.2,-0.95) 4(1.2,-0.95) 5(1.2,0.95)
SOT23-6
  oval 0.6x1.25 smd: 1(-0.95,-1.525) 2(0,-1.525) 3(0.95,-1.525) 4(0.95,1.525) 5(0,1.525) 6(-0.95,1.525)
SW4_SMD
  custom 2.4x1.75 smd: 1(3.556,2.54) 2(-3.556,2.54) 3(-3.556,-2.54) 4(3.556,-2.54)
SW8B700_1300H950
  round 1.3 hole 0.7: 1(-2.5,-1.25) 2(0,-1.25) 3(2.5,-1.25) 4(2.5,1.25) 5(0,1.25) 6(-2.5,1.25)
  round 1.8 hole 1.2: 7(-5.7,-2) 8(5.7,2)
TO3B575_738H650
  rect 1.3x1.3 hole 0.8: 1(-2.54,0)
  round 1.3 hole 0.8: 2(0,0) 3(2.54,0)
TP_SMD
  round 1.016 smd: 1(0,0)
TS-026-3
  round 1.8 hole 1.2: 1(-1.5,-2) 2(1.5,-2) 3(0,0)
unnamed#2
  round 0.76 smd: (0,0)
USB4P200B1310_1420H700
  rect 1.1x3.8 smd: 1(-3.5,0) 2(-1,0) 3(1,0) 4(3.5,0)
  round 3.3 hole 2.3: 5(-6.57,-3.9) 6(6.57,-3.9)
USB30AFDIP
  round 1.2 hole 0.7: 1(-3.5,0) 2(-1,0) 3(1,0) 4(3.5,0) 5(4,1.5) 6(2,1.5) 7(0,1.5) 8(-2,1.5) 9(-4,1.5)
  round 3.2 hole 2.3: 10(-6.57,-2) 11(6.57,-2)
X4B250_320H80_SMD
  rect 1.05x1.3 smd: 1(-0.925,1.15) 2(-0.925,-1.15) 3(0.925,-1.15) 4(0.925,1.15)
XCOL-SMD
  oval 1x2 smd: 1(-0.75,0) 2(0.75,0)
  oval 2.5x5 smd: 3(0,5.5)
YLM1206F2SF
  rect 0.95x0.6 smd: 1(-1.5,0.55) 2(1.5,0.55) 3(1.5,-0.55) 4(-1.5,-0.55)
YPF0805F2SF
  rect 0.85x0.4 smd: 1(-0.925,0.425) 2(0.925,0.425) 3(0.925,-0.425) 4(-0.925,-0.425)

## Nets
GND: ANTW1.2 ANTW3.2 ANTW4.2 C1.1 CA5.2 CA6.2 CA7.2 CA9.2 CA10.2 CC1.1 CC2.1 CC3.1 CC4.1 CC5.1 CC6.1 CC9.1 CC10.1 CC11.1 CC12.1 CC13.1 CC14.1 CC15.1 CC16.1 CC17.1 CC18.1 CC19.1 CC20.1 CC21.1 CC22.1 CC23.1 CC24.1 CC25.1 CC26.1 CC27.1 CC28.1 CC29.1 CC30.1 CC31.1 CC32.1 CC33.1 CC34.1 CC35.1 CC36.1 CC37.1 CC38.1 CC39.1 CC41.1 CC42.1 CC43.1 CC44.1 CC45.1 CC46.1 CC47.1 CC48.1 CC49.1 CC50.1 CC51.1 CC52.1 CC53.1 CC54.1 CC55.1 CC56.1 CC57.1 CC58.1 CC59.1 CC60.1 CC61.1 CC62.1 CC63.1 CD1.1 CD2.1 CD3.1 CD4.1 CD5.1 CD6.1 CD7.1 CD8.1 CD9.1 CD10.1 CD11.1 CD12.1 CD13.1 CD14.1 CD15.1 CD16.1 CD17.1 CD18.1 CD19.1 CD20.1 CD21.1 CD22.1 CD23.1 CD24.1 CD25.1 CD26.1 CD27.1 CD28.1 CD29.1 CD30.1 CD31.1 CD32.1 CD33.1 CD34.1 CE1.2 CE2.2 CE3.2 CE6.2 CE7.2 CE10.2 CE11.2 CF1.1 CF2.1 CH1.2 CH2.2 CK1.2 CK2.2 CK3.2 CK4.2 CN1.1 CN2.1 CN3.1 CN4.1 CN5.1 CN6.1 CN7.1 CN8.1 CN9.1 CN10.1 CN11.1 CN12.1 CN13.1 CP3.2 CP4.2 CP5.2 CP6.2 CP7.2 CP8.2 CP9.2 CP10.2 CP11.1 CP12.1 CP13.2 CP16.2 CP17.1 CP18.1 CP19.1 CP20.2 CP21.1 CP22.1 CP23.1 CP24.2 CP25.1 CP26.1 CP27.2 CP28.1 CP29.2 CP30.1 CP31.1 CP32.2 CP33.1 CP34.2 CP35.2 CP36.1 CR1.1 CT1.1 CU1.1 CU2.1 CU3.1 CU4.1 CU5.1 CU6.1 CU7.1 CW1.2 CW2.1 CW3.2 CW4.1 CW7.1 CW8.1 CW9.1 CW10.1 CW11.1 CW12.2 CW13.2 CW14.2 CW15.2 CW17.1 CW19.2 CW20.2 CW21.2 CW22.2 CW23.2 CW24.1 CW25.1 CW26.2 CW27.2 CW28.2 CW29.2 DA1.1(ANODE) DA2.1(ANODE) DA3.1(ANODE) DC1.2(CATHODE) DE3.1(ANODE) DE4.1(ANODE) DF1.2(CATHODE) DH2.2(CATHODE) DH3.2(CATHODE) DH4.2(CATHODE) DH5.2(CATHODE) DK1.2(CATHODE) DT1.2(CATHODE) DT2.2(CATHODE) DT3.2(CATHODE) DT4.2(CATHODE) DT5.2(CATHODE) DT6.2(CATHODE) DU1.2(CATHODE) DU2.2(CATHODE) DU3.2(CATHODE) DU4.2(CATHODE) JA1.4 JC1.1 JC1.2 JE1.9 JE1.10 JF1.3 JH1.2(G_D2) JH1.5(G_D1) JH1.8(G_D0) JH1.11(G_CLK) JH1.17(G_DDC/CEC) JH1.20(SHIELD1) JH1.21(SHIELD2) JH1.22(SHIELD3) JH1.23(SHIELD4) JP1.1(GND0) JP1.3(GND1) JP1.4(GND2) JT1.6(VSS2) JT1.10(GND0) JT1.11(GND1) JT1.12(GND2) JT1.13(GND3) JU1.4(GND) JU1.5(SHIELD1) JU1.6(SHIELD2) JU2.4(GND) JU2.7(GND-DRAIN) JU2.10(SHIELD-1) JU2.11(SHIELD-2) LE2.2 LE2.4 LE4.2 LE4.4 QL1.2(E) QL2.2(E) QL3.2(E) RA11.1 RA12.2 RA13.2 RC5.2 RC7.2 RC8.2 RC9.2 RC12.2 RC21.2 RC22.2 RC23.2 RD1.2 RD5.1 RD6.1 RD7.1 RD8.1 RD9.1 RL7.2 RL11.2 RL15.2 RN2.1 RN4.1 RN8.1 RP3.1 RT4.1 RU2.1 RU3.1 RW13.1 RW25.1 RW27.1 RW28.1 RW29.1 RW33.2 RW44.1 SWK1.2 SWK2.2 SWK3.2 SWK4.1 SWK4.3 SWP1.7 SWP1.8 TP11.1(TP) TP12.1(TP) TP13.1(TP) TP14.1(TP) U1.A1(AGND1) U1.A16(GND2) U1.A21(GND3) U1.A23(GND4) U1.AA8(GND140) U1.AA16(GND141) U1.AA21(GND142) U1.AB3(GND143) U1.AB13(GND144) U1.AB21(GND145) U1.AC1(GND146) U1.AC5(GND147) U1.AC11(GND148) U1.AC19(GND149) U1.AC23(GND150) U1.C12(GND6) U1.C13(GND7) U1.C14(GND8) U1.C18(GND9) U1.C22(GND10) U1.D23(GND11) U1.E1(AGND2) U1.E3(AGND3) U1.E5(AGND4) U1.E13(GND17) U1.E15(GND18) U1.E16(GND19) U1.E18(GND20) U1.F12(GND21) U1.F13(GND22) U1.F14(GND23) U1.F15(GND24) U1.F16(GND25) U1.F17(GND26) U1.F21(GND27) U1.G7(GND1) U1.G9(GND28) U1.G15(GND29) U1.H1(GND30) U1.H7(GND31) U1.H8(GND32) U1.H9(GND33) U1.H10(GND34) U1.H12(GND35) U1.H15(GND36) U1.H16(GND37) U1.H23(GND38) U1.J7(GND39) U1.J8(GND40) U1.J9(GND41) U1.J10(GND42) U1.J11(GND43) U1.J12(GND44) U1.J15(GND45) U1.J16(GND46) U1.J17(GND47) U1.K7(GND48) U1.K8(GND49) U1.K9(GND50) U1.K10(GND51) U1.K11(GND52) U1.K12(GND53) U1.K13(GND54) U1.K14(GND55) U1.K15(GND56) U1.K16(GND57) U1.K17(GND58) U1.L6(PD2/LCD0-D4/TS0-SYNC/CSI-HSYNC/) U1.L7(GND59) U1.L9(GND60) U1.L10(GND61) U1.L11(GND62) U1.L12(GND63) U1.L13(GND64) U1.L14(GND65) U1.L15(GND66) U1.L18(GND67) U1.M1(GND68) U1.M2(PD4/LCD0-D6/TS0-D0/CSI-D0/RGMII) U1.M3(PD1/LCD0-D3/TS0-ERR/CSI-MCLK/RG) U1.M4(PD5/LCD0-D7/TS0-D1/CSI-D1/RGMII) U1.M5(PD3/LCD0-D5/TS0-DVLD/CSI-VSYNC/) U1.M6(PD10/LCD0-D14/TS0-D6/CSI-D6/RGM) U1.M7(GND69) U1.M10(GND70) U1.M11(GND71) U1.M12(GND72) U1.M13(GND73) U1.M14(GND74) U1.M15(GND75) U1.M18(GND76) U1.M23(GND77) U1.N2(PD6/LCD0-D10/TS0-D2/CSI-D2/RGMI) U1.N3(PD0/LCD0-D2/TS0-CLK/CSI-PCLK/RG) U1.N7(GND78) U1.N10(GND79) U1.N11(GND80) U1.N12(GND81) U1.N13(GND82) U1.N14(GND83) U1.N15(GND84) U1.N18(GND85) U1.P1(PD11/LCD0-D15/TS0-D7/CSI-D7/RGM) U1.P2(PD9/LCD0-D13/TS0-D5/CSI-D5/RGMI) U1.P3(PD19/LCD0-DE/TS2-SYNC/UART2-TX/) U1.P4(PD18/LCD0-CLK/TS2-ERR/DMIC-DATA) U1.P5(PD8/LCD0-D12/TS0-D4/CSI-D4/RGMI) U1.P6(PD13/LCD0-D19/TS1-ERR/CSI-SDA/R) U1.P7(GND86) U1.P10(GND87) U1.P11(GND88) U1.P12(GND89) U1.P13(GND90) U1.P14(GND91) U1.P20(GND92) U1.R2(PD16/LCD0-D22/TS1-D0/DMIC-DATA1) U1.R3(PD15/LCD0-D21/TS1-DVLD/DMIC-DAT) U1.R5(PD26/TWI0-SDA/TS3-D0/UART3-CTS/) U1.R8(GND93) U1.R9(GND94) U1.R10(GND95) U1.R11(GND96) U1.R12(GND97) U1.R13(GND98) U1.R14(GND99) U1.R15(GND100) U1.R17(GND101) U1.R18(GND102) U1.T1(PD7/LCD0-D11/TS0-D3/CSI-D3/RGMI) U1.T2(PD17/LCD0-D23/TS2-CLK/DMIC-DATA) U1.T3(PD21/LCD0-VSYNC/TS2-D0/UART2-RT) U1.T7(GND103) U1.T8(GND104) U1.T9(GND105) U1.T10(GND106) U1.T11(GND107) U1.T12(GND108) U1.T13(GND109) U1.T14(GND110) U1.T15(GND111) U1.T16(GND112) U1.T18(GND113) U1.T19(GND114) U1.U2(PD22/PWM0/TS3-CLK/UART2-CTS) U1.U3(PD25/TWI0-SCK/TS3-DVLD/UART3-RT) U1.U4(PD14/LCD0-D20/TS1-SYNC/DMIC-CLK) U1.U5(PD23/TWI2-SCK/TS3-ERR/UART3-TX/) U1.U6(GND115) U1.U7(GND116) U1.U9(GND117) U1.U10(GND118) U1.U11(GND119) U1.U12(GND120) U1.U15(GND121) U1.U17(GND122) U1.U18(GND123) U1.U22(GND124) U1.U23(GND125) U1.V1(PD24/TWI2-SDA/TS3-SYNC/UART3-RX) U1.V2(PD12/LCD0-D18/TS1-CLK/CSI-SCK/R) U1.V3(PD20/LCD0-HSYNC/TS2-DVLD/UART2-) U1.V5(GND126) U1.V7(GND127) U1.V13(GND128) U1.V17(GND129) U1.V19(GND130) U1.V20(GND131) U1.W1(GND132) U1.W3(GND133) U1.W10(GND134) U1.W21(GND135) U1.W23(GND136) U1.Y5(GND137) U1.Y13(GND138) U1.Y19(GND139) UA1.11(GND) UD1.A9(VSS#9) UD1.B1(VSSQ#1) UD1.B3(VSS#6) UD1.B9(VSSQ#7) UD1.D1(VSSQ#2) UD1.D8(VSSQ#5) UD1.E1(VSS#1) UD1.E2(VSSQ#4) UD1.E8(VSSQ#6) UD1.F9(VSSQ#8) UD1.G1(VSSQ#3) UD1.G8(VSS#7) UD1.G9(VSSQ#9) UD1.J2(VSS#5) UD1.J8(VSS#8) UD1.M1(VSS#2) UD1.M9(VSS#10) UD1.P1(VSS#3) UD1.P9(VSS#11) UD1.T1(VSS#4) UD1.T9(VSS#12) UD2.A9(VSS#9) UD2.B1(VSSQ#1) UD2.B3(VSS#6) UD2.B9(VSSQ#7) UD2.D1(VSSQ#2) UD2.D8(VSSQ#5) UD2.E1(VSS#1) UD2.E2(VSSQ#4) UD2.E8(VSSQ#6) UD2.F9(VSSQ#8) UD2.G1(VSSQ#3) UD2.G8(VSS#7) UD2.G9(VSSQ#9) UD2.J2(VSS#5) UD2.J8(VSS#8) UD2.M1(VSS#2) UD2.M9(VSS#10) UD2.P1(VSS#3) UD2.P9(VSS#11) UD2.T1(VSS#4) UD2.T9(VSS#12) UH1.3(GND1) UH1.8(GND2) UH2.3(GND1) UH2.8(GND2) UN1.AA4(VSSQ4) UN1.AA6(VSSQ5) UN1.K4(VSSQ1) UN1.M7(VSS1) UN1.P5(VSS2) UN1.R10(VSS3) UN1.U8(VSS6) UN1.Y2(VSSQ2) UN1.Y5(VSSQ3) UN2.2(NC2) UN2.13(VSS1) UN2.23(NC8) UN2.25(NC10) UN2.36(VSS2) UN2.48(NC22) UP2.8(PGNDD) UP2.11(PGNDE) UP2.37(PGNDB_1) UP2.38(PGNDB_2) UP2.41(PGNDA_2) UP2.42(PGNDA_1) UP2.48(PGNDC_2) UP2.49(PGNDC_1) UP2.54(FBGND) UP2.57(GND) UP3.1(GND) UR1.2(GND) UU1.2(GND) UU2.3(GND1) UU2.8(GND2) UW1.1(GND1) UW1.3(GND2) UW1.4(GND3) UW1.5(GND4) UW1.6(GND5) UW1.7(GND6) UW1.8(GND7) UW1.10(GND8) UW1.11(GND9) UW1.23(GND10) UW1.32(GND11) UW1.39(GND12) UW2.2(GND) UW3.1(GND1) UW3.3(GND2) UW3.20(GND3) UW3.31(GND4) UW3.33(GND5) UW3.36(GND6) UW4.2(GND) XC1.2(GND1) XC1.4(GND2) XC2.3(SHIELD) XC3.2(GND1) XC3.4(GND2) XW1.2(GND1) XW1.4(GND2) XW2.2(GND1) XW2.4(GND2)
VCC18-RTC: CC54.2 CP11.2 RC13.1 RP5.1 RP8.1 RP9.1 U1.F20(VCC-RTC)
VCC33-WIFI2: CW9.2 CW14.1 CW15.1 CW16.2 CW17.2 CW26.1 LW2.2 RW10.2 RW36.2 RW46.1 RW47.2 UW1.36(VBAT) UW3.9(VBAT) UW4.1(VIN) UW4.3(EN)
VCC-12V: CP6.1 CP7.1 RP2.2 SWP1.1 SWP1.6 UP3.3(VIN)
VCC-DCXOIO: CC4.2 CC6.2 CC43.2 CW11.2 CW21.1 CW22.1 RP11.1 RP13.1 RW1.2 RW2.2 RW3.2 RW4.2 RW5.2 RW9.1 RW21.1 RW22.1 RW23.1 RW24.1 RW26.2 RW30.2 RW32.2 RW45.2 RW46.2 RW48.2 RW49.2 U1.A22(DXVCCIO) U1.H6(VCC-PG) U1.M19(VCC-PM) UW1.34(VDDIO) UW3.22(VDDIO)
